# EAGLE board RedBoard_Turbo-Panel (EAGLE 9.0.1), part 1 of 4
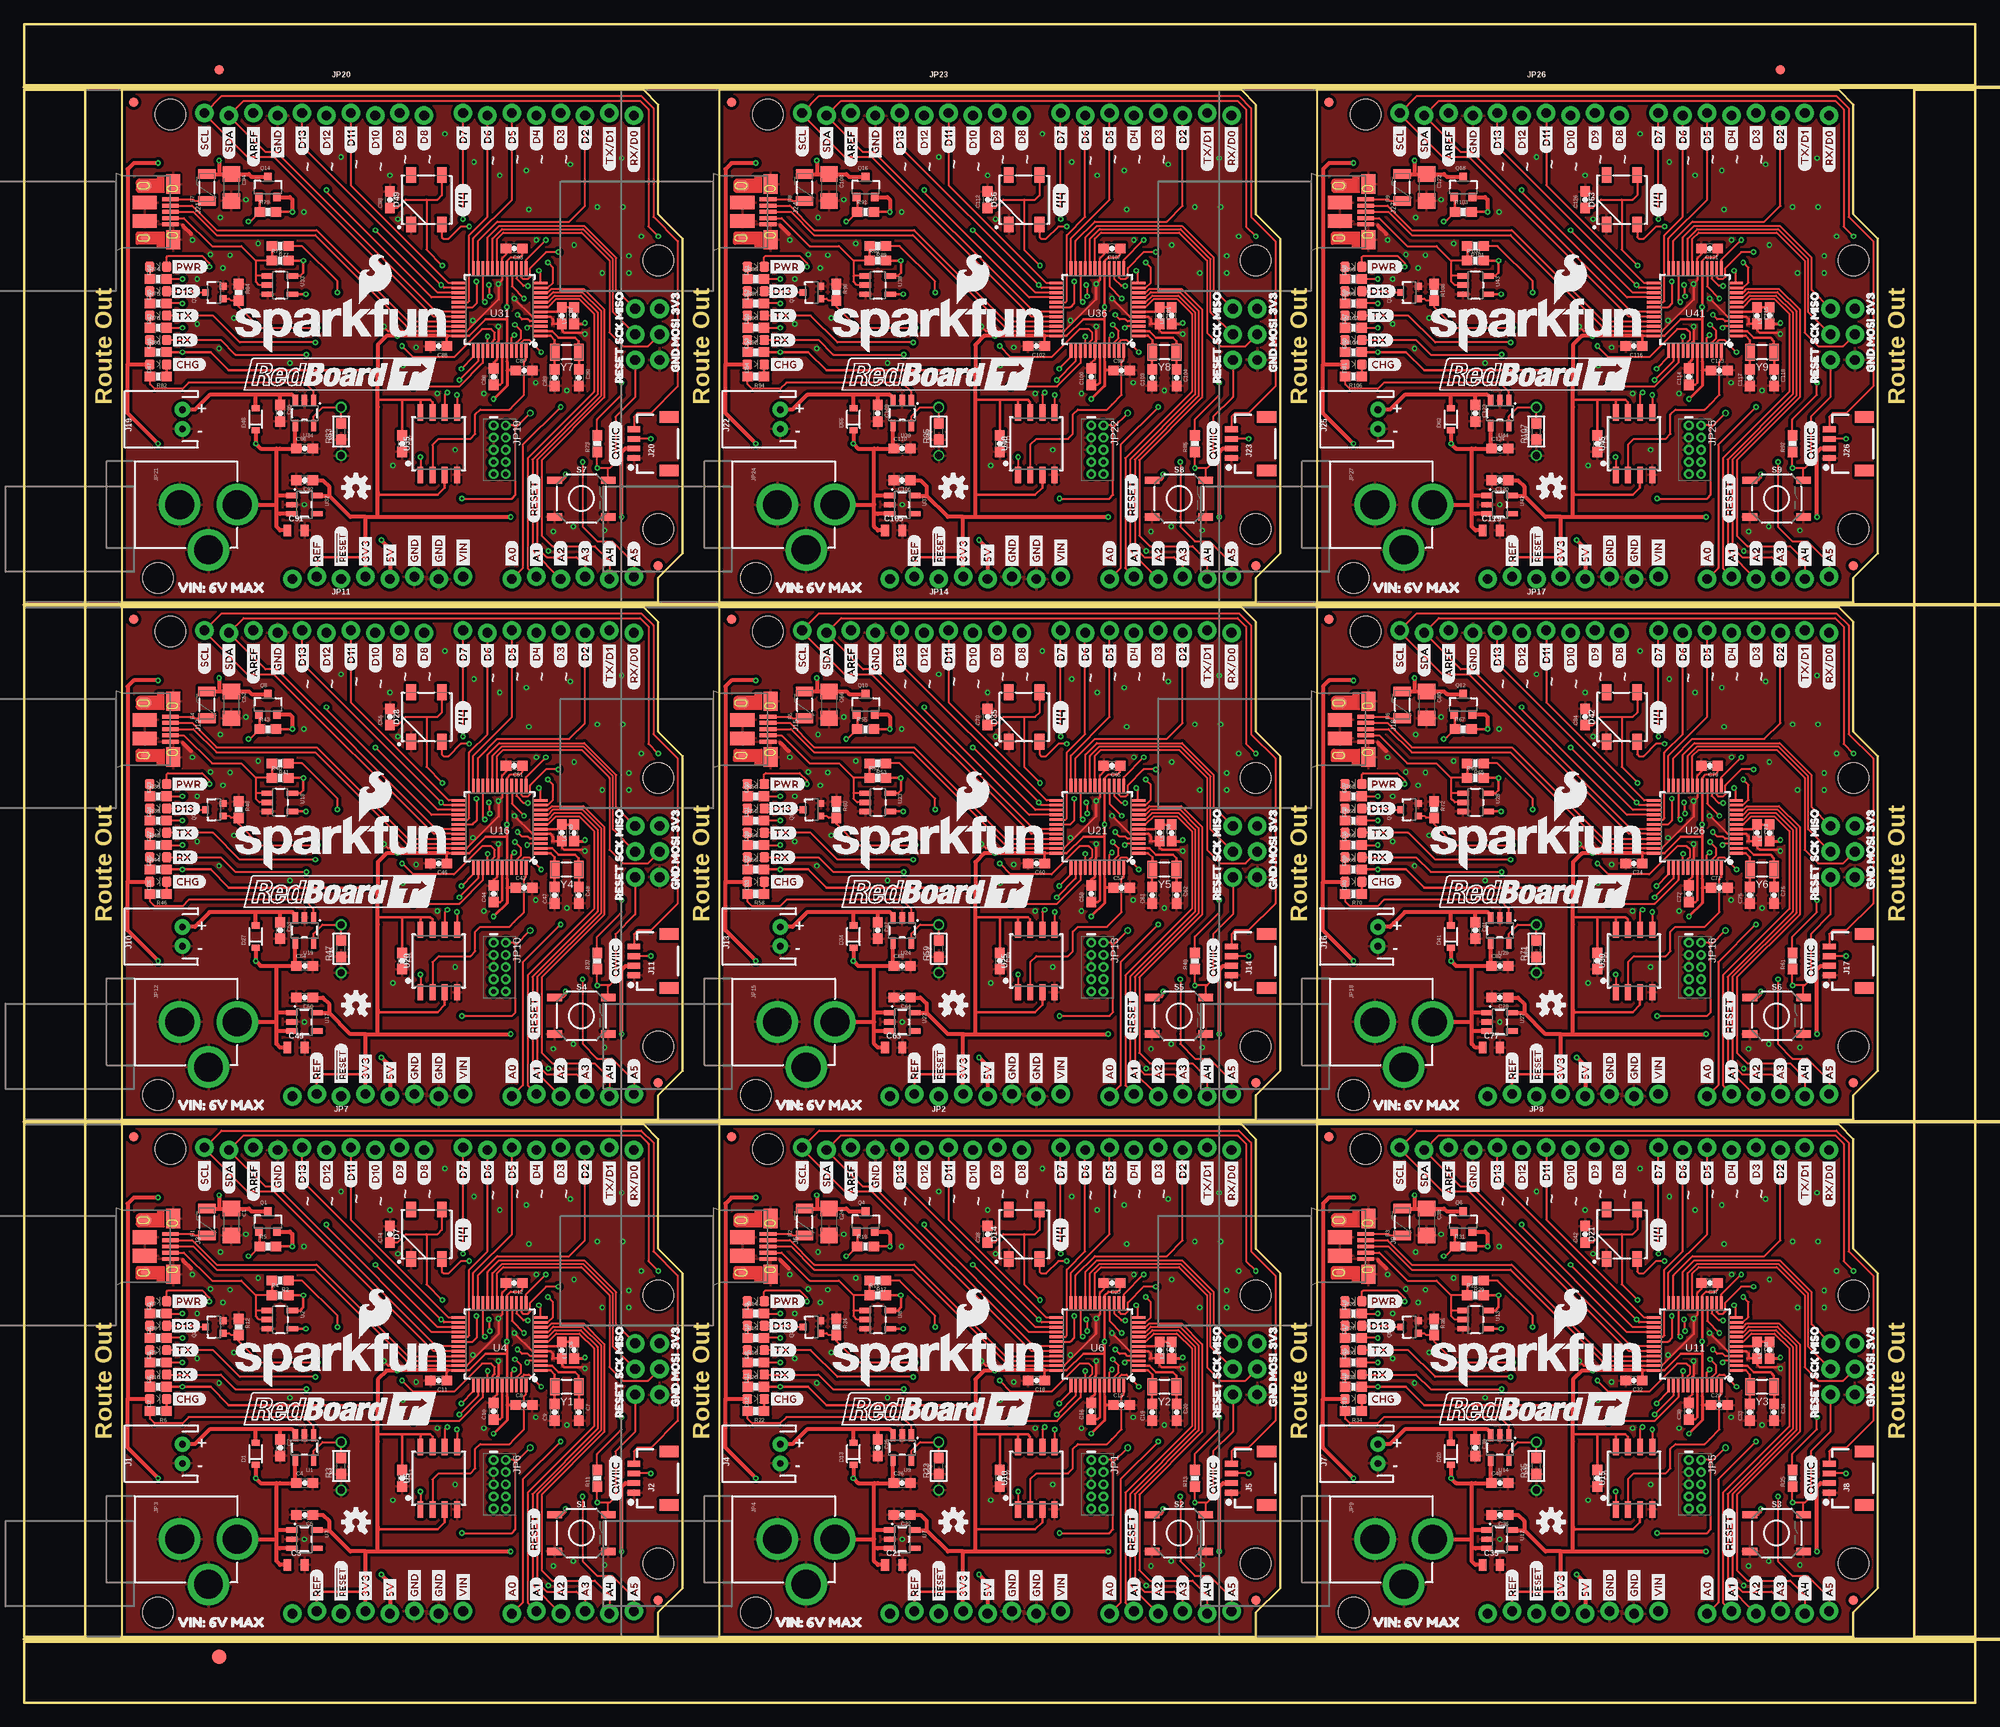
[diagram p0: board, top side]
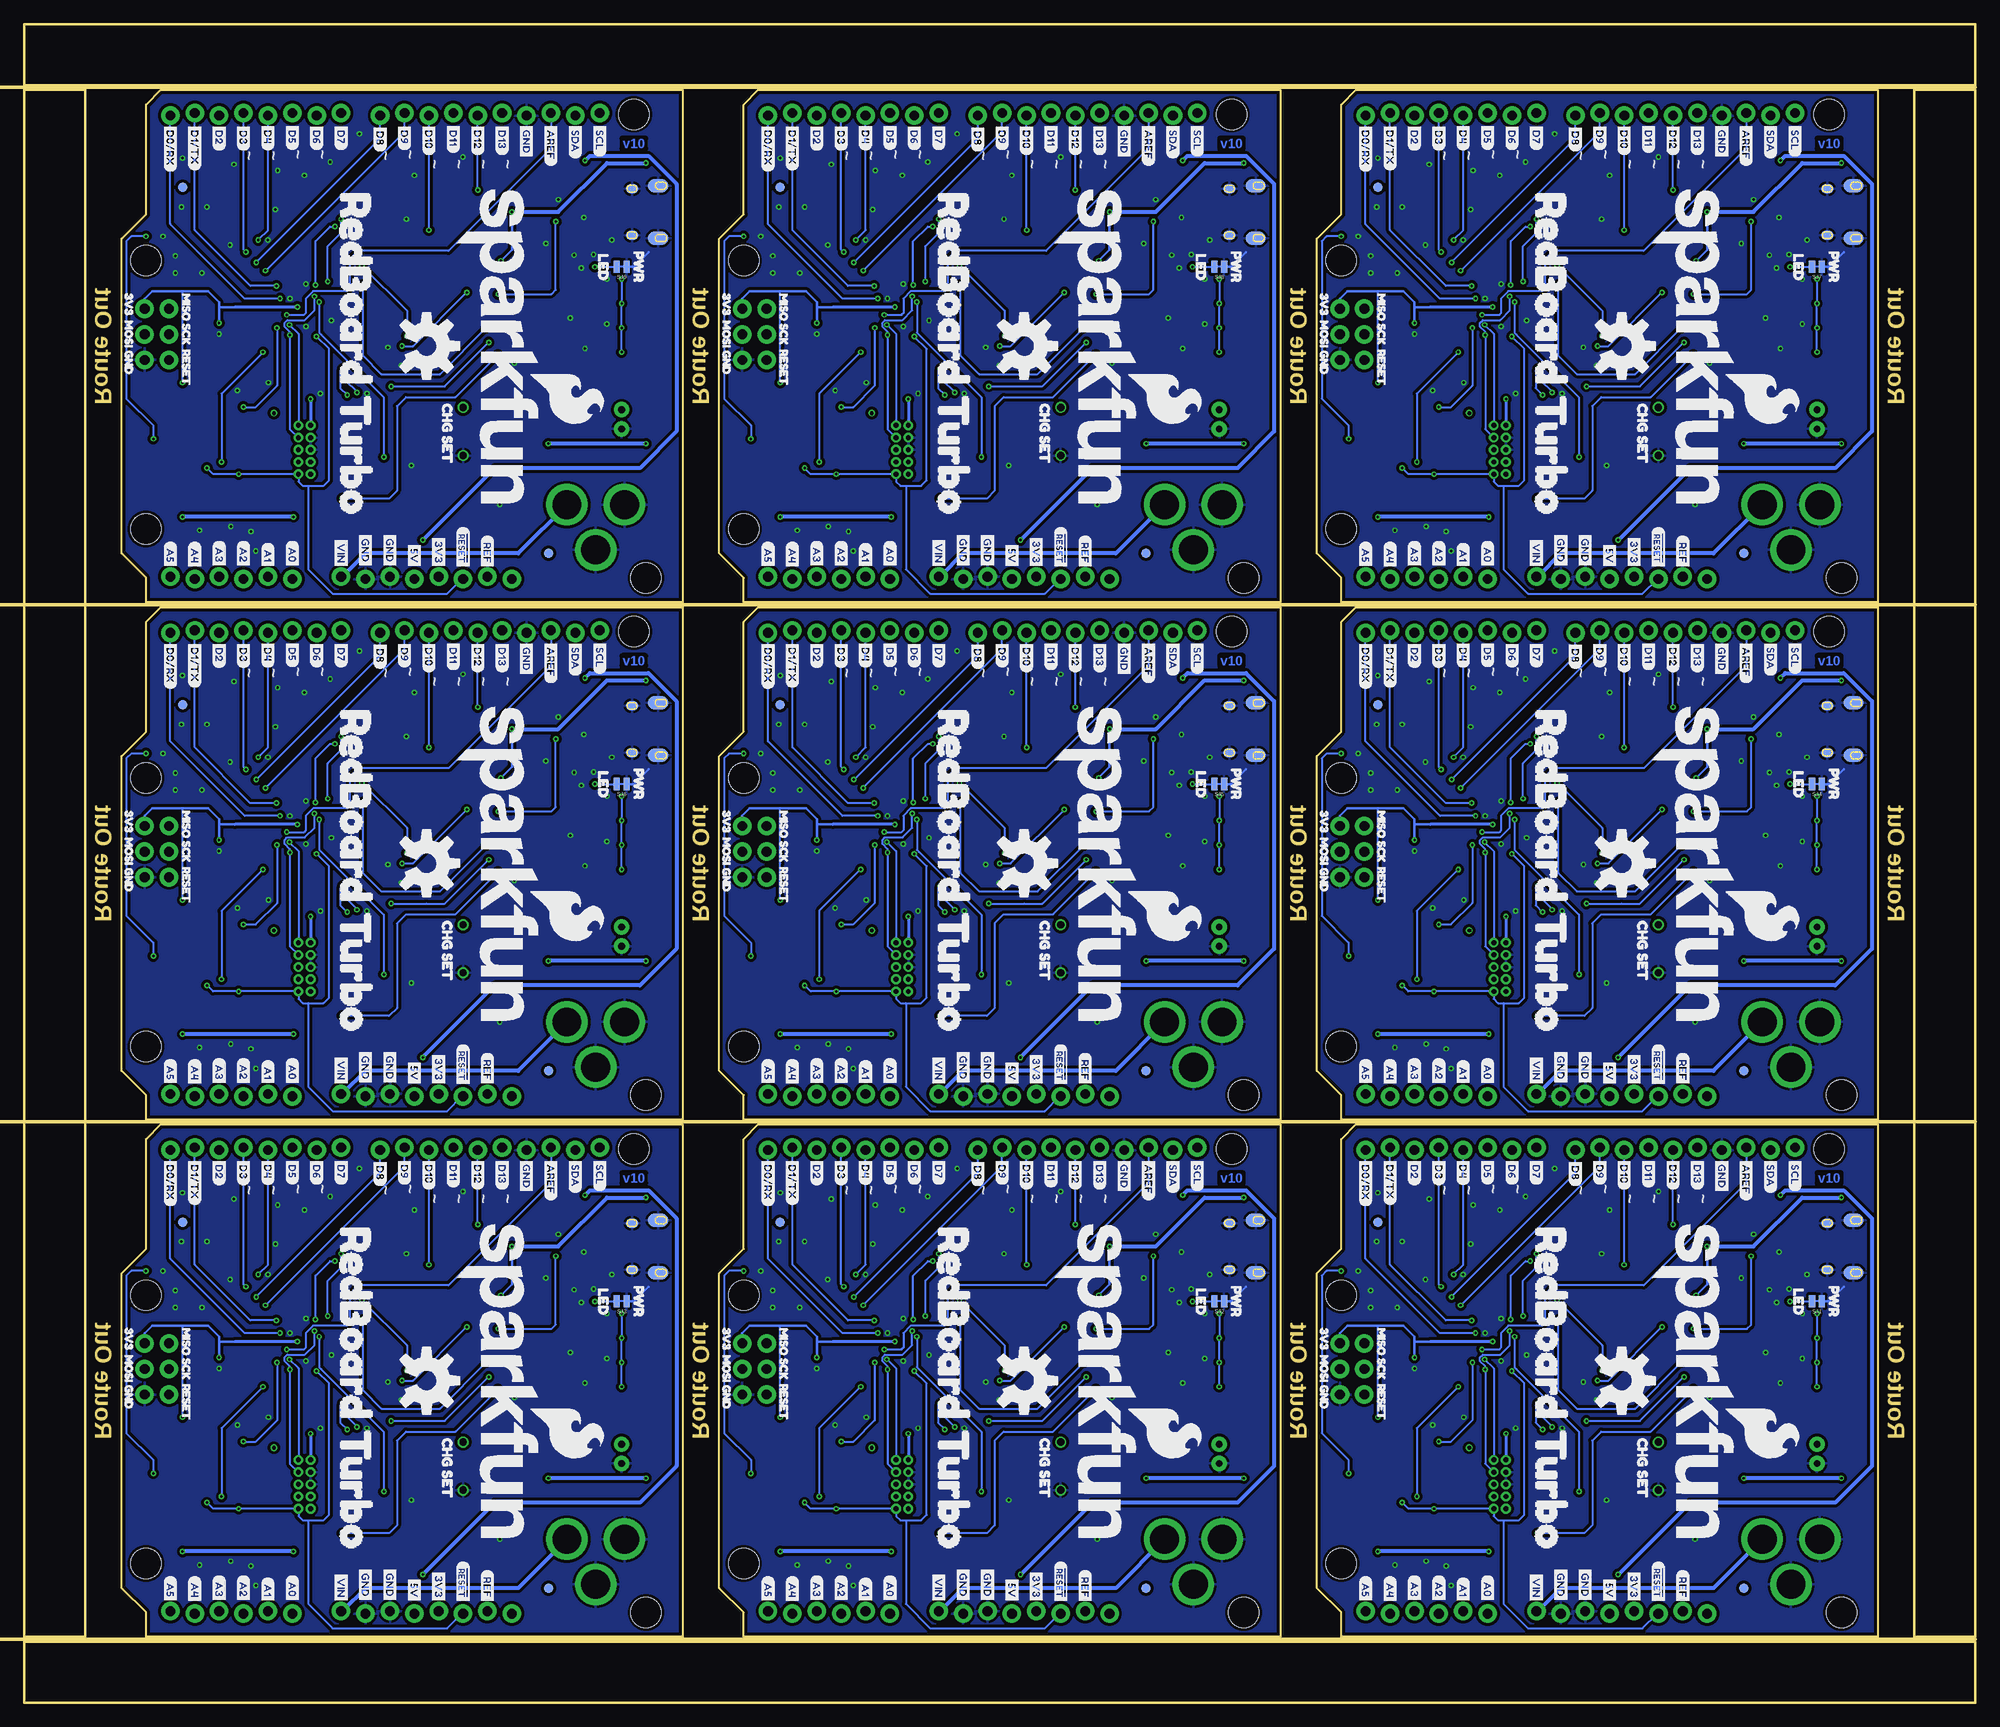
[diagram p1: board, bottom side, seen from below]

Size 203.2 x 174.75 mm. Coordinates in mm from the lower left corner, seen from the top.
Outline: 10.16,60.2 10.16,6.86 66.04,6.86 66.04,9.4 68.58,11.94 68.58,44.7 66.04,47.24 66.04,58.67 64.52,60.2 10.16,60.2
Outline: 72.39,60.2 72.39,6.86 128.27,6.86 128.27,9.4 130.81,11.94 130.81,44.7 128.27,47.24 128.27,58.67 126.75,60.2 72.39,60.2
Outline: 134.62,60.2 134.62,6.86 190.5,6.86 190.5,9.4 193.04,11.94 193.04,44.7 190.5,47.24 190.5,58.67 188.98,60.2 134.62,60.2
Outline: 10.16,114.05 10.16,60.71 66.04,60.71 66.04,63.25 68.58,65.79 68.58,98.55 66.04,101.09 66.04,112.52 64.52,114.05 10.16,114.05
Outline: 72.39,114.05 72.39,60.71 128.27,60.71 128.27,63.25 130.81,65.79 130.81,98.55 128.27,101.09 128.27,112.52 126.75,114.05 72.39,114.05
Outline: 134.62,114.05 134.62,60.71 190.5,60.71 190.5,63.25 193.04,65.79 193.04,98.55 190.5,101.09 190.5,112.52 188.98,114.05 134.62,114.05
Outline: 10.16,167.89 10.16,114.55 66.04,114.55 66.04,117.09 68.58,119.63 68.58,152.4 66.04,154.94 66.04,166.37 64.52,167.89 10.16,167.89
Outline: 72.39,167.89 72.39,114.55 128.27,114.55 128.27,117.09 130.81,119.63 130.81,152.4 128.27,154.94 128.27,166.37 126.75,167.89 72.39,167.89
Outline: 134.62,167.89 134.62,114.55 190.5,114.55 190.5,117.09 193.04,119.63 193.04,152.4 190.5,154.94 190.5,166.37 188.98,167.89 134.62,167.89
Outline: 0,6.35 203.2,6.35 203.2,0 0,0 0,6.35
Outline: 196.85,167.89 203.2,167.89 203.2,6.86 196.85,6.86 196.85,167.89
Outline: 0,174.75 203.2,174.75 203.2,168.4 0,168.4 0,174.75
Outline: 0,167.89 6.35,167.89 6.35,6.86 0,6.86 0,167.89
Copper layers (1*16): Top 0.035mm / dielectric 1.5mm / Bottom 0.035mm
Design rules "SparkFun-2-layer-PCBWay-LIMIT": minimum track width 6mil, minimum drill 0.3mm, track to track 6mil, track to pad 6mil, pad to pad 6mil, via to via 6mil, smd to smd 6mil, copper to edge 6mil, drill to drill 6mil, minimum pad ring 6mil, minimum via ring 6mil, stop-mask expansion 4mil, vias tented up to drill 25mil, thermal gap 10mil
Milling: 4 lines

## Footprints (pad centres in the part's own frame; a part is rotated, then mirrored left to right if it is on the bottom)
1206@1 = smd 1.6 x 1.8: 1 -1.4,0; 2 1.4,0
0603-CAP = smd 1.1 x 1: 1 -0.85,0; 2 0.85,0
0805 = smd 0.8 x 1.2: 1 -0.9,0; 2 0.9,0
SOD-323 = smd 0.63 x 0.83: A 1.15,0; C -1.15,0
LED-0603 = smd 1 x 1: A -0.877,0; C 0.877,0
WS2812B = smd 1.651 x 1: 1 2.577,-1.6; 2 2.577,1.6; 3 -2.577,1.6; 4 -2.577,-1.6
FIDUCIAL-1X2 = smd 1 x 1: 1 0,0
FIDUCIAL-1.5X3 = smd 1.5 x 1.5: 1 0,0
PTC-1206 = smd 1 x 1.8: 1 -1.4,0; 2 1.4,0
JST-2-PTH = drill 0.7 pad 1.6: 1 -1,0; 2 1,0
1X04_1MM_RA = smd 0.6 x 1.35: 1 -1.5,0; 2 -0.5,0; 3 0.5,0; 4 1.5,0 | smd 1.2 x 2: NC1 2.8,-3.675; NC2 -2.8,-3.675
USB-MICROB-PTH-MILL = smd 0.4 x 1.75: D+ 0,0; D- -0.65,0; GND 1.3,0; ID 0.65,0; VBUS -1.3,0 | smd 2 x 1.46: SHIELD -2.9,0.275; SHIELD2 2.9,0.275 | smd 1.425 x 2.5: SHIELD3 -0.963,-2.675; SHIELD4 0.963,-2.675 | smd 1.4 x 2.1 bottom: SHIELD5 -2.731,-2.531; SHIELD7 2.729,-2.531 | smd 1 x 1: SHIELD6 2.7,-2.575 | smd 1.1 x 1.5: SHIELD8 -2.731,-2.731 | smd 1 x 1.3 bottom: SHIELD9 -2.43,0.195; SHIELD10 2.43,0.195
2X5-PTH-1.27MM = drill 0.508 pad 1: 1 -2.54,-0.635; 2 -2.54,0.635; 3 -1.27,-0.635; 4 -1.27,0.635; 5 0,-0.635; 6 0,0.635; 7 1.27,-0.635; 8 1.27,0.635; 9 2.54,-0.635; 10 2.54,0.635
ARDUINO_R3_LOCK_HOLES = drill 1.016 pad 1.93: 3.3V 35.56,2.667; 5V 38.1,2.413; A0 50.8,2.413; A1 53.34,2.667; A2 55.88,2.413; A3 58.42,2.667; A4 60.96,2.413; A5 63.5,2.667; AREF 23.876,50.927; D0 63.5,50.673; D1 60.96,50.927; D2 58.42,50.673; D3 55.88,50.927; D4 53.34,50.673; D5 50.8,50.927; D6 48.26,50.673; D7 45.72,50.927; D8 41.656,50.673; D9 39.116,50.927; D10 36.576,50.673; D11 34.036,50.927; D12 31.496,50.673; D13 28.956,50.927; GND@1 40.64,2.667; GND@2 43.18,2.413; GND@3 26.416,50.673; GND@4 66.18,25.223; IOREF 30.48,2.667; MISO 63.64,30.557; MOSI 66.18,27.89; NC 27.94,2.413; RESET@1 33.02,2.413; RESET@2 63.64,25.223; SCK 63.64,27.89; SCL 18.796,50.927; SDA 21.336,50.673; VCC 66.18,30.557; VIN 45.72,2.667 | hole 3.175: 15.24,50.8; 66.04,35.56; 66.04,7.62; 13.97,2.54
POWER_JACK_PTH = drill 2.997 pad 4.318: GND 0,7.7; GNDBREAK 4.7,10.7; PWR 0,13.7
0603 = smd 1.1 x 1: 1 -0.85,0; 2 0.85,0
SOT23-3 = smd 0.8 x 0.9: 1 -0.95,-1; 2 0.95,-1; 3 0,1.1
SOT323 = smd 0.7 x 0.7: 1 -0.65,-0.925; 2 0.65,-0.925; 3 0,0.925
0603-RES = smd 1.1 x 1: 1 -0.85,0; 2 0.85,0
1/6W-RES = drill 0.762: 1 -2.5,0; 2 2.5,0
TACTILE_SWITCH_SMD_5.2MM = smd 1.524 x 0.762: 1 -2.794,1.905; 2 2.794,1.905; 3 -2.794,-1.905; 4 2.794,-1.905
PAD-JUMPER-2-NC_BY_TRACE_NO_SILK = smd 0.635 x 1.27: 1 -0.508,0; 2 0.508,0
TP_15TH = drill 0.381 pad 0.61: P$1 0,0
SOT23-5 = smd 0.55 x 1.2: 1 -0.95,-1.3; 2 0,-1.3; 3 0.95,-1.3; 4 0.95,1.3; 5 -0.95,1.3
TQFP-48 = smd 1.5 x 0.28: 1 -4.25,2.75; 2 -4.25,2.25; 3 -4.25,1.75; 4 -4.25,1.25; 5 -4.25,0.75; 6 -4.25,0.25; 7 -4.25,-0.25; 8 -4.25,-0.75; 9 -4.25,-1.25; 10 -4.25,-1.75; 11 -4.25,-2.25; 12 -4.25,-2.75; 25 4.25,-2.75; 26 4.25,-2.25; 27 4.25,-1.75; 28 4.25,-1.25; 29 4.25,-0.75; 30 4.25,-0.25; 31 4.25,0.25; 32 4.25,0.75; 33 4.25,1.25; 34 4.25,1.75; 35 4.25,2.25; 36 4.25,2.75 | smd 0.28 x 1.5: 13 -2.75,-4.25; 14 -2.25,-4.25; 15 -1.75,-4.25; 16 -1.25,-4.25; 17 -0.75,-4.25; 18 -0.25,-4.25; 19 0.25,-4.25; 20 0.75,-4.25; 21 1.25,-4.25; 22 1.75,-4.25; 23 2.25,-4.25; 24 2.75,-4.25; 37 2.75,4.25; 38 2.25,4.25; 39 1.75,4.25; 40 1.25,4.25; 41 0.75,4.25; 42 0.25,4.25; 43 -0.25,4.25; 44 -0.75,4.25; 45 -1.25,4.25; 46 -1.75,4.25; 47 -2.25,4.25; 48 -2.75,4.25
SOIC-8 = smd 0.61 x 1.702: 1 -1.905,-3.251; 2 -0.635,-3.251; 3 0.635,-3.251; 4 1.905,-3.251; 5 1.905,3.251; 6 0.635,3.251; 7 -0.635,3.251; 8 -1.905,3.251
CRYSTAL-SMD-3.2X1.5MM = smd 1 x 1.8: P$1 -1.25,0; P$2 1.25,0

## Placement (x,y rotation side)
C1  2.2UF  [1206@1]  21.59,50.04 270 top
C2  4.7uF  [0603-CAP]  26.67,26.54 270 top
C3  1.0uF  [0805]  28.32,14.35 0 top
C4  4.7uF  [0603-CAP]  29.21,22.86 0 top
C5  2.2uF  [0603-CAP]  29.21,19.56 180 top
C6  0.1uF  [0603-CAP]  56.01,36.7 270 top
C7  15pF  [0603-CAP]  57.78,30.23 270 top
C8  0.1uF  [0603-CAP]  52.07,30.99 0 top
C9  15pF  [0603-CAP]  55.25,30.23 90 top
C10  0.1uF  [0603-CAP]  48.89,30.35 90 top
C11  0.1uF  [0603-CAP]  43.18,33.53 180 top
C12  0.1uF  [0603-CAP]  51.05,43.69 180 top
C13  0.1uF  [0603-CAP]  39.37,23.37 270 top
C14  0.1uF  [0603-CAP]  38.1,48.77 90 top
C15  0.1uF  [0603-CAP]  114.3,30.99 0 top
C16  0.1uF  [0603-CAP]  111.12,30.35 90 top
C17  0.1uF  [0603-CAP]  118.24,36.7 270 top
C18  0.1uF  [0603-CAP]  105.41,33.53 180 top
C19  15pF  [0603-CAP]  117.47,30.23 90 top
C20  15pF  [0603-CAP]  120.02,30.23 270 top
C21  1.0uF  [0805]  90.55,14.35 0 top
C22  2.2uF  [0603-CAP]  91.44,19.56 180 top
C23  0.1uF  [0603-CAP]  113.28,43.69 180 top
C24  2.2UF  [1206@1]  83.82,50.04 270 top
C25  4.7uF  [0603-CAP]  88.9,26.54 270 top
C26  4.7uF  [0603-CAP]  91.44,22.86 0 top
C27  0.1uF  [0603-CAP]  101.6,23.37 270 top
C28  0.1uF  [0603-CAP]  100.33,48.77 90 top
C29  0.1uF  [0603-CAP]  176.53,30.99 0 top
C30  0.1uF  [0603-CAP]  173.35,30.35 90 top
C31  0.1uF  [0603-CAP]  180.47,36.7 270 top
C32  0.1uF  [0603-CAP]  167.64,33.53 180 top
C33  15pF  [0603-CAP]  179.7,30.23 90 top
C34  15pF  [0603-CAP]  182.25,30.23 270 top
C35  1.0uF  [0805]  152.78,14.35 0 top
C36  2.2uF  [0603-CAP]  153.67,19.56 180 top
C37  0.1uF  [0603-CAP]  175.51,43.69 180 top
C38  2.2UF  [1206@1]  146.05,50.04 270 top
C39  4.7uF  [0603-CAP]  151.13,26.54 270 top
C40  4.7uF  [0603-CAP]  153.67,22.86 0 top
C41  0.1uF  [0603-CAP]  163.83,23.37 270 top
C42  0.1uF  [0603-CAP]  162.56,48.77 90 top
C43  0.1uF  [0603-CAP]  52.07,84.84 0 top
C44  0.1uF  [0603-CAP]  48.89,84.2 90 top
C45  0.1uF  [0603-CAP]  56.01,90.55 270 top
C46  0.1uF  [0603-CAP]  43.18,87.38 180 top
C47  15pF  [0603-CAP]  55.25,84.07 90 top
C48  15pF  [0603-CAP]  57.78,84.07 270 top
C49  1.0uF  [0805]  28.32,68.2 0 top
C50  2.2uF  [0603-CAP]  29.21,73.41 180 top
C51  0.1uF  [0603-CAP]  51.05,97.54 180 top
C52  2.2UF  [1206@1]  21.59,103.89 270 top
C53  4.7uF  [0603-CAP]  26.67,80.39 270 top
C54  4.7uF  [0603-CAP]  29.21,76.71 0 top
C55  0.1uF  [0603-CAP]  39.37,77.22 270 top
C56  0.1uF  [0603-CAP]  38.1,102.62 90 top
C57  0.1uF  [0603-CAP]  114.3,84.84 0 top
C58  0.1uF  [0603-CAP]  111.12,84.2 90 top
C59  0.1uF  [0603-CAP]  118.24,90.55 270 top
C60  0.1uF  [0603-CAP]  105.41,87.38 180 top
C61  15pF  [0603-CAP]  117.47,84.07 90 top
C62  15pF  [0603-CAP]  120.02,84.07 270 top
C63  1.0uF  [0805]  90.55,68.2 0 top
C64  2.2uF  [0603-CAP]  91.44,73.41 180 top
C65  0.1uF  [0603-CAP]  113.28,97.54 180 top
C66  2.2UF  [1206@1]  83.82,103.89 270 top
C67  4.7uF  [0603-CAP]  88.9,80.39 270 top
C68  4.7uF  [0603-CAP]  91.44,76.71 0 top
C69  0.1uF  [0603-CAP]  101.6,77.22 270 top
C70  0.1uF  [0603-CAP]  100.33,102.62 90 top
C71  0.1uF  [0603-CAP]  176.53,84.84 0 top
C72  0.1uF  [0603-CAP]  173.35,84.2 90 top
C73  0.1uF  [0603-CAP]  180.47,90.55 270 top
C74  0.1uF  [0603-CAP]  167.64,87.38 180 top
C75  15pF  [0603-CAP]  179.7,84.07 90 top
C76  15pF  [0603-CAP]  182.25,84.07 270 top
C77  1.0uF  [0805]  152.78,68.2 0 top
C78  2.2uF  [0603-CAP]  153.67,73.41 180 top
C79  0.1uF  [0603-CAP]  175.51,97.54 180 top
C80  2.2UF  [1206@1]  146.05,103.89 270 top
C81  4.7uF  [0603-CAP]  151.13,80.39 270 top
C82  4.7uF  [0603-CAP]  153.67,76.71 0 top
C83  0.1uF  [0603-CAP]  163.83,77.22 270 top
C84  0.1uF  [0603-CAP]  162.56,102.62 90 top
C85  0.1uF  [0603-CAP]  52.07,138.68 0 top
C86  0.1uF  [0603-CAP]  48.89,138.05 90 top
C87  0.1uF  [0603-CAP]  56.01,144.4 270 top
C88  0.1uF  [0603-CAP]  43.18,141.22 180 top
C89  15pF  [0603-CAP]  55.25,137.92 90 top
C90  15pF  [0603-CAP]  57.78,137.92 270 top
C91  1.0uF  [0805]  28.32,122.05 0 top
C92  2.2uF  [0603-CAP]  29.21,127.25 180 top
C93  0.1uF  [0603-CAP]  51.05,151.38 180 top
C94  2.2UF  [1206@1]  21.59,157.73 270 top
C95  4.7uF  [0603-CAP]  26.67,134.24 270 top
C96  4.7uF  [0603-CAP]  29.21,130.56 0 top
C97  0.1uF  [0603-CAP]  39.37,131.06 270 top
C98  0.1uF  [0603-CAP]  38.1,156.46 90 top
C99  0.1uF  [0603-CAP]  114.3,138.68 0 top
C100  0.1uF  [0603-CAP]  111.12,138.05 90 top
C101  0.1uF  [0603-CAP]  118.24,144.4 270 top
C102  0.1uF  [0603-CAP]  105.41,141.22 180 top
C103  15pF  [0603-CAP]  117.47,137.92 90 top
C104  15pF  [0603-CAP]  120.02,137.92 270 top
C105  1.0uF  [0805]  90.55,122.05 0 top
C106  2.2uF  [0603-CAP]  91.44,127.25 180 top
C107  0.1uF  [0603-CAP]  113.28,151.38 180 top
C108  2.2UF  [1206@1]  83.82,157.73 270 top
C109  4.7uF  [0603-CAP]  88.9,134.24 270 top
C110  4.7uF  [0603-CAP]  91.44,130.56 0 top
C111  0.1uF  [0603-CAP]  101.6,131.06 270 top
C112  0.1uF  [0603-CAP]  100.33,156.46 90 top
C113  0.1uF  [0603-CAP]  176.53,138.68 0 top
C114  0.1uF  [0603-CAP]  173.35,138.05 90 top
C115  0.1uF  [0603-CAP]  180.47,144.4 270 top
C116  0.1uF  [0603-CAP]  167.64,141.22 180 top
C117  15pF  [0603-CAP]  179.7,137.92 90 top
C118  15pF  [0603-CAP]  182.25,137.92 270 top
C119  1.0uF  [0805]  152.78,122.05 0 top
C120  2.2uF  [0603-CAP]  153.67,127.25 180 top
C121  0.1uF  [0603-CAP]  175.51,151.38 180 top
C122  2.2UF  [1206@1]  146.05,157.73 270 top
C123  4.7uF  [0603-CAP]  151.13,134.24 270 top
C124  4.7uF  [0603-CAP]  153.67,130.56 0 top
C125  0.1uF  [0603-CAP]  163.83,131.06 270 top
C126  0.1uF  [0603-CAP]  162.56,156.46 90 top
D1  BAT20J  [SOD-323]  24.13,25.91 90 top
D2  Yellow  [LED-0603]  13.97,31.62 0 top
D3  RED  [LED-0603]  13.97,41.78 0 top
D4  BLUE  [LED-0603]  13.97,39.24 0 top
D5  GREEN  [LED-0603]  13.97,36.7 0 top
D6  Yellow  [LED-0603]  13.97,34.16 0 top
D7  WS2812B  [WS2812B]  41.91,48.77 90 top
D8  GREEN  [LED-0603]  76.2,36.7 0 top
D9  RED  [LED-0603]  76.2,41.78 0 top
D10  BLUE  [LED-0603]  76.2,39.24 0 top
D11  Yellow  [LED-0603]  76.2,34.16 0 top
D12  Yellow  [LED-0603]  76.2,31.62 0 top
D13  BAT20J  [SOD-323]  86.36,25.91 90 top
D14  WS2812B  [WS2812B]  104.14,48.77 90 top
D15  GREEN  [LED-0603]  138.43,36.7 0 top
D16  RED  [LED-0603]  138.43,41.78 0 top
D17  BLUE  [LED-0603]  138.43,39.24 0 top
D18  Yellow  [LED-0603]  138.43,34.16 0 top
D19  Yellow  [LED-0603]  138.43,31.62 0 top
D20  BAT20J  [SOD-323]  148.59,25.91 90 top
D21  WS2812B  [WS2812B]  166.37,48.77 90 top
D22  GREEN  [LED-0603]  13.97,90.55 0 top
D23  RED  [LED-0603]  13.97,95.63 0 top
D24  BLUE  [LED-0603]  13.97,93.09 0 top
D25  Yellow  [LED-0603]  13.97,88.01 0 top
D26  Yellow  [LED-0603]  13.97,85.47 0 top
D27  BAT20J  [SOD-323]  24.13,79.76 90 top
D28  WS2812B  [WS2812B]  41.91,102.62 90 top
D29  GREEN  [LED-0603]  76.2,90.55 0 top
D30  RED  [LED-0603]  76.2,95.63 0 top
D31  BLUE  [LED-0603]  76.2,93.09 0 top
D32  Yellow  [LED-0603]  76.2,88.01 0 top
D33  Yellow  [LED-0603]  76.2,85.47 0 top
D34  BAT20J  [SOD-323]  86.36,79.76 90 top
D35  WS2812B  [WS2812B]  104.14,102.62 90 top
D36  GREEN  [LED-0603]  138.43,90.55 0 top
D37  RED  [LED-0603]  138.43,95.63 0 top
D38  BLUE  [LED-0603]  138.43,93.09 0 top
D39  Yellow  [LED-0603]  138.43,88.01 0 top
D40  Yellow  [LED-0603]  138.43,85.47 0 top
D41  BAT20J  [SOD-323]  148.59,79.76 90 top
D42  WS2812B  [WS2812B]  166.37,102.62 90 top
D43  GREEN  [LED-0603]  13.97,144.4 0 top
D44  RED  [LED-0603]  13.97,149.48 0 top
D45  BLUE  [LED-0603]  13.97,146.94 0 top
D46  Yellow  [LED-0603]  13.97,141.86 0 top
D47  Yellow  [LED-0603]  13.97,139.32 0 top
D48  BAT20J  [SOD-323]  24.13,133.6 90 top
D49  WS2812B  [WS2812B]  41.91,156.46 90 top
D50  GREEN  [LED-0603]  76.2,144.4 0 top
D51  RED  [LED-0603]  76.2,149.48 0 top
D52  BLUE  [LED-0603]  76.2,146.94 0 top
D53  Yellow  [LED-0603]  76.2,141.86 0 top
D54  Yellow  [LED-0603]  76.2,139.32 0 top
D55  BAT20J  [SOD-323]  86.36,133.6 90 top
D56  WS2812B  [WS2812B]  104.14,156.46 90 top
D57  GREEN  [LED-0603]  138.43,144.4 0 top
D58  RED  [LED-0603]  138.43,149.48 0 top
D59  BLUE  [LED-0603]  138.43,146.94 0 top
D60  Yellow  [LED-0603]  138.43,141.86 0 top
D61  Yellow  [LED-0603]  138.43,139.32 0 top
D62  BAT20J  [SOD-323]  148.59,133.6 90 top
D63  WS2812B  [WS2812B]  166.37,156.46 90 top
E$1  [FIDUCIAL-1X2]  20.32,169.99 0 top
E$2  [FIDUCIAL-1X2]  182.88,169.99 0 top
E$3  [FIDUCIAL-1.5X3]  20.32,4.76 0 top
F1  500mA  [PTC-1206]  19.05,50.04 90 top
F2  500mA  [PTC-1206]  81.28,50.04 90 top
F3  500mA  [PTC-1206]  143.51,50.04 90 top
F4  500mA  [PTC-1206]  19.05,103.89 90 top
F5  500mA  [PTC-1206]  81.28,103.89 90 top
F6  500mA  [PTC-1206]  143.51,103.89 90 top
F7  500mA  [PTC-1206]  19.05,157.73 90 top
F8  500mA  [PTC-1206]  81.28,157.73 90 top
F9  500mA  [PTC-1206]  143.51,157.73 90 top
FID1  FIDUCIAL1X2  [FIDUCIAL-1X2]  11.43,58.93 0 top
FID2  FIDUCIAL1X2  [FIDUCIAL-1X2]  66.04,10.67 0 top
FID3  FIDUCIAL1X2  [FIDUCIAL-1X2]  24.13,11.94 0 bottom
FID4  FIDUCIAL1X2  [FIDUCIAL-1X2]  62.23,50.04 0 bottom
FID5  FIDUCIAL1X2  [FIDUCIAL-1X2]  128.27,10.67 0 top
FID6  FIDUCIAL1X2  [FIDUCIAL-1X2]  73.66,58.93 0 top
FID7  FIDUCIAL1X2  [FIDUCIAL-1X2]  86.36,11.94 0 bottom
FID8  FIDUCIAL1X2  [FIDUCIAL-1X2]  124.46,50.04 0 bottom
FID9  FIDUCIAL1X2  [FIDUCIAL-1X2]  190.5,10.67 0 top
FID10  FIDUCIAL1X2  [FIDUCIAL-1X2]  135.89,58.93 0 top
FID11  FIDUCIAL1X2  [FIDUCIAL-1X2]  148.59,11.94 0 bottom
FID12  FIDUCIAL1X2  [FIDUCIAL-1X2]  186.69,50.04 0 bottom
FID13  FIDUCIAL1X2  [FIDUCIAL-1X2]  66.04,64.52 0 top
FID14  FIDUCIAL1X2  [FIDUCIAL-1X2]  11.43,112.78 0 top
FID15  FIDUCIAL1X2  [FIDUCIAL-1X2]  24.13,65.79 0 bottom
FID16  FIDUCIAL1X2  [FIDUCIAL-1X2]  62.23,103.89 0 bottom
FID17  FIDUCIAL1X2  [FIDUCIAL-1X2]  128.27,64.52 0 top
FID18  FIDUCIAL1X2  [FIDUCIAL-1X2]  73.66,112.78 0 top
FID19  FIDUCIAL1X2  [FIDUCIAL-1X2]  86.36,65.79 0 bottom
FID20  FIDUCIAL1X2  [FIDUCIAL-1X2]  124.46,103.89 0 bottom
FID21  FIDUCIAL1X2  [FIDUCIAL-1X2]  190.5,64.52 0 top
FID22  FIDUCIAL1X2  [FIDUCIAL-1X2]  135.89,112.78 0 top
FID23  FIDUCIAL1X2  [FIDUCIAL-1X2]  148.59,65.79 0 bottom
FID24  FIDUCIAL1X2  [FIDUCIAL-1X2]  186.69,103.89 0 bottom
FID25  FIDUCIAL1X2  [FIDUCIAL-1X2]  66.04,118.36 0 top
FID26  FIDUCIAL1X2  [FIDUCIAL-1X2]  11.43,166.62 0 top
FID27  FIDUCIAL1X2  [FIDUCIAL-1X2]  24.13,119.63 0 bottom
FID28  FIDUCIAL1X2  [FIDUCIAL-1X2]  62.23,157.73 0 bottom
FID29  FIDUCIAL1X2  [FIDUCIAL-1X2]  128.27,118.36 0 top
FID30  FIDUCIAL1X2  [FIDUCIAL-1X2]  73.66,166.62 0 top
FID31  FIDUCIAL1X2  [FIDUCIAL-1X2]  86.36,119.63 0 bottom
FID32  FIDUCIAL1X2  [FIDUCIAL-1X2]  124.46,157.73 0 bottom
FID33  FIDUCIAL1X2  [FIDUCIAL-1X2]  190.5,118.36 0 top
FID34  FIDUCIAL1X2  [FIDUCIAL-1X2]  135.89,166.62 0 top
FID35  FIDUCIAL1X2  [FIDUCIAL-1X2]  148.59,119.63 0 bottom
FID36  FIDUCIAL1X2  [FIDUCIAL-1X2]  186.69,157.73 0 bottom
J1  [JST-2-PTH]  16.51,25.91 90 top
J2  [1X04_1MM_RA]  63.5,23.37 90 top
J3  [USB-MICROB-PTH-MILL]  15.24,47.5 270 top
J4  [JST-2-PTH]  78.74,25.91 90 top
J5  [1X04_1MM_RA]  125.73,23.37 90 top
J6  [USB-MICROB-PTH-MILL]  77.47,47.5 270 top
J7  [JST-2-PTH]  140.97,25.91 90 top
J8  [1X04_1MM_RA]  187.96,23.37 90 top
J9  [USB-MICROB-PTH-MILL]  139.7,47.5 270 top
J10  [JST-2-PTH]  16.51,79.76 90 top
J11  [1X04_1MM_RA]  63.5,77.22 90 top
J12  [USB-MICROB-PTH-MILL]  15.24,101.35 270 top
J13  [JST-2-PTH]  78.74,79.76 90 top
J14  [1X04_1MM_RA]  125.73,77.22 90 top
J15  [USB-MICROB-PTH-MILL]  77.47,101.35 270 top
J16  [JST-2-PTH]  140.97,79.76 90 top
J17  [1X04_1MM_RA]  187.96,77.22 90 top
J18  [USB-MICROB-PTH-MILL]  139.7,101.35 270 top
J19  [JST-2-PTH]  16.51,133.6 90 top
J20  [1X04_1MM_RA]  63.5,131.06 90 top
J21  [USB-MICROB-PTH-MILL]  15.24,155.19 270 top
J22  [JST-2-PTH]  78.74,133.6 90 top
J23  [1X04_1MM_RA]  125.73,131.06 90 top
J24  [USB-MICROB-PTH-MILL]  77.47,155.19 270 top
J25  [JST-2-PTH]  140.97,133.6 90 top
J26  [1X04_1MM_RA]  187.96,131.06 90 top
J27  [USB-MICROB-PTH-MILL]  139.7,155.19 270 top
JP1  CORTEX_DEBUGPTH  [2X5-PTH-1.27MM]  111.76,22.73 270 top
JP2  ARDUINO_UNO_R3LOCK_HOLES  [ARDUINO_R3_LOCK_HOLES]  62.23,6.86 0 top
JP3  POWER_JACKPTH  [POWER_JACK_PTH]  8.51,17.02 270 top
JP4  POWER_JACKPTH  [POWER_JACK_PTH]  70.74,17.02 270 top
JP5  CORTEX_DEBUGPTH  [2X5-PTH-1.27MM]  173.99,22.73 270 top
JP6  CORTEX_DEBUGPTH  [2X5-PTH-1.27MM]  49.53,22.73 270 top
JP7  ARDUINO_UNO_R3LOCK_HOLES  [ARDUINO_R3_LOCK_HOLES]  0,6.86 0 top
JP8  ARDUINO_UNO_R3LOCK_HOLES  [ARDUINO_R3_LOCK_HOLES]  124.46,6.86 0 top
JP9  POWER_JACKPTH  [POWER_JACK_PTH]  132.97,17.02 270 top
JP10  CORTEX_DEBUGPTH  [2X5-PTH-1.27MM]  49.53,76.58 270 top
JP11  ARDUINO_UNO_R3LOCK_HOLES  [ARDUINO_R3_LOCK_HOLES]  0,60.71 0 top
JP12  POWER_JACKPTH  [POWER_JACK_PTH]  8.51,70.87 270 top
JP13  CORTEX_DEBUGPTH  [2X5-PTH-1.27MM]  111.76,76.58 270 top
JP14  ARDUINO_UNO_R3LOCK_HOLES  [ARDUINO_R3_LOCK_HOLES]  62.23,60.71 0 top
JP15  POWER_JACKPTH  [POWER_JACK_PTH]  70.74,70.87 270 top
JP16  CORTEX_DEBUGPTH  [2X5-PTH-1.27MM]  173.99,76.58 270 top
JP17  ARDUINO_UNO_R3LOCK_HOLES  [ARDUINO_R3_LOCK_HOLES]  124.46,60.71 0 top
JP18  POWER_JACKPTH  [POWER_JACK_PTH]  132.97,70.87 270 top
JP19  CORTEX_DEBUGPTH  [2X5-PTH-1.27MM]  49.53,130.43 270 top
JP20  ARDUINO_UNO_R3LOCK_HOLES  [ARDUINO_R3_LOCK_HOLES]  0,114.55 0 top
JP21  POWER_JACKPTH  [POWER_JACK_PTH]  8.51,124.71 270 top
JP22  CORTEX_DEBUGPTH  [2X5-PTH-1.27MM]  111.76,130.43 270 top
JP23  ARDUINO_UNO_R3LOCK_HOLES  [ARDUINO_R3_LOCK_HOLES]  62.23,114.55 0 top
JP24  POWER_JACKPTH  [POWER_JACK_PTH]  70.74,124.71 270 top
JP25  CORTEX_DEBUGPTH  [2X5-PTH-1.27MM]  173.99,130.43 270 top
JP26  ARDUINO_UNO_R3LOCK_HOLES  [ARDUINO_R3_LOCK_HOLES]  124.46,114.55 0 top
JP27  POWER_JACKPTH  [POWER_JACK_PTH]  132.97,124.71 270 top
L1  FB - 30Ohm  [0603]  57.28,36.7 90 top
L2  FB - 30Ohm  [0603]  119.51,36.7 90 top
L3  FB - 30Ohm  [0603]  181.74,36.7 90 top
L4  FB - 30Ohm  [0603]  57.28,90.55 90 top
L5  FB - 30Ohm  [0603]  119.51,90.55 90 top
L6  FB - 30Ohm  [0603]  181.74,90.55 90 top
L7  FB - 30Ohm  [0603]  57.28,144.4 90 top
L8  FB - 30Ohm  [0603]  119.51,144.4 90 top
L9  FB - 30Ohm  [0603]  181.74,144.4 90 top
LOGO1  SFE_LOGO_NAME_FLAME.2_INCH  [SFE_LOGO_NAME_FLAME_.2]  33.02,35.69 0 top
LOGO2  SFE_LOGO_NAME_FLAME.3_INCH  [SFE_LOGO_NAME_FLAME_.3]  29.46,33.53 270 bottom
LOGO3  OSHW-LOGOS  [OSHW-LOGO-S]  34.54,18.8 0 top
LOGO4  OSHW-LOGOL  [OSHW-LOGO-L]  36.83,33.53 270 bottom
LOGO5  OSHW-LOGOS  [OSHW-LOGO-S]  96.77,18.8 0 top
LOGO6  SFE_LOGO_NAME_FLAME.2_INCH  [SFE_LOGO_NAME_FLAME_.2]  95.25,35.69 0 top
LOGO7  SFE_LOGO_NAME_FLAME.3_INCH  [SFE_LOGO_NAME_FLAME_.3]  91.69,33.53 270 bottom
LOGO8  OSHW-LOGOL  [OSHW-LOGO-L]  99.06,33.53 270 bottom
LOGO9  OSHW-LOGOS  [OSHW-LOGO-S]  159,18.8 0 top
LOGO10  SFE_LOGO_NAME_FLAME.2_INCH  [SFE_LOGO_NAME_FLAME_.2]  157.48,35.69 0 top
LOGO11  SFE_LOGO_NAME_FLAME.3_INCH  [SFE_LOGO_NAME_FLAME_.3]  153.92,33.53 270 bottom
LOGO12  OSHW-LOGOL  [OSHW-LOGO-L]  161.29,33.53 270 bottom
LOGO13  OSHW-LOGOS  [OSHW-LOGO-S]  34.54,72.64 0 top
LOGO14  SFE_LOGO_NAME_FLAME.2_INCH  [SFE_LOGO_NAME_FLAME_.2]  33.02,89.54 0 top
LOGO15  SFE_LOGO_NAME_FLAME.3_INCH  [SFE_LOGO_NAME_FLAME_.3]  29.46,87.38 270 bottom
LOGO16  OSHW-LOGOL  [OSHW-LOGO-L]  36.83,87.38 270 bottom
LOGO17  OSHW-LOGOS  [OSHW-LOGO-S]  96.77,72.64 0 top
LOGO18  SFE_LOGO_NAME_FLAME.2_INCH  [SFE_LOGO_NAME_FLAME_.2]  95.25,89.54 0 top
LOGO19  SFE_LOGO_NAME_FLAME.3_INCH  [SFE_LOGO_NAME_FLAME_.3]  91.69,87.38 270 bottom
LOGO20  OSHW-LOGOL  [OSHW-LOGO-L]  99.06,87.38 270 bottom
LOGO21  OSHW-LOGOS  [OSHW-LOGO-S]  159,72.64 0 top
LOGO22  SFE_LOGO_NAME_FLAME.2_INCH  [SFE_LOGO_NAME_FLAME_.2]  157.48,89.54 0 top
LOGO23  SFE_LOGO_NAME_FLAME.3_INCH  [SFE_LOGO_NAME_FLAME_.3]  153.92,87.38 270 bottom
LOGO24  OSHW-LOGOL  [OSHW-LOGO-L]  161.29,87.38 270 bottom
LOGO25  OSHW-LOGOS  [OSHW-LOGO-S]  34.54,126.49 0 top
LOGO26  SFE_LOGO_NAME_FLAME.2_INCH  [SFE_LOGO_NAME_FLAME_.2]  33.02,143.38 0 top
LOGO27  SFE_LOGO_NAME_FLAME.3_INCH  [SFE_LOGO_NAME_FLAME_.3]  29.46,141.22 270 bottom
LOGO28  OSHW-LOGOL  [OSHW-LOGO-L]  36.83,141.22 270 bottom
LOGO29  OSHW-LOGOS  [OSHW-LOGO-S]  96.77,126.49 0 top
LOGO30  SFE_LOGO_NAME_FLAME.2_INCH  [SFE_LOGO_NAME_FLAME_.2]  95.25,143.38 0 top
LOGO31  SFE_LOGO_NAME_FLAME.3_INCH  [SFE_LOGO_NAME_FLAME_.3]  91.69,141.22 270 bottom
LOGO32  OSHW-LOGOL  [OSHW-LOGO-L]  99.06,141.22 270 bottom
LOGO33  OSHW-LOGOS  [OSHW-LOGO-S]  159,126.49 0 top
LOGO34  SFE_LOGO_NAME_FLAME.2_INCH  [SFE_LOGO_NAME_FLAME_.2]  157.48,143.38 0 top
LOGO35  SFE_LOGO_NAME_FLAME.3_INCH  [SFE_LOGO_NAME_FLAME_.3]  153.92,141.22 270 bottom
LOGO36  OSHW-LOGOL  [OSHW-LOGO-L]  161.29,141.22 270 bottom
Q1  2.5A/30V  [SOT23-3]  25.4,50.04 0 top
Q2  2N7002PW  [SOT323]  19.81,39.12 90 top
Q3  2N7002PW  [SOT323]  82.04,39.12 90 top
Q4  2.5A/30V  [SOT23-3]  87.63,50.04 0 top
Q5  2N7002PW  [SOT323]  144.27,39.12 90 top
Q6  2.5A/30V  [SOT23-3]  149.86,50.04 0 top
Q7  2N7002PW  [SOT323]  19.81,92.96 90 top
Q8  2.5A/30V  [SOT23-3]  25.4,103.89 0 top
Q9  2N7002PW  [SOT323]  82.04,92.96 90 top
Q10  2.5A/30V  [SOT23-3]  87.63,103.89 0 top
Q11  2N7002PW  [SOT323]  144.27,92.96 90 top
Q12  2.5A/30V  [SOT23-3]  149.86,103.89 0 top
Q13  2N7002PW  [SOT323]  19.81,146.81 90 top
Q14  2.5A/30V  [SOT23-3]  25.4,157.73 0 top
Q15  2N7002PW  [SOT323]  82.04,146.81 90 top
Q16  2.5A/30V  [SOT23-3]  87.63,157.73 0 top
Q17  2N7002PW  [SOT323]  144.27,146.81 90 top
Q18  2.5A/30V  [SOT23-3]  149.86,157.73 0 top
R1  3.9K  [0603]  33.02,24.64 90 top
R2  330  [0603-RES]  26.67,43.94 180 top
R3  PROG  [1/6W-RES]  33.02,24.64 90 top
R4  100k  [0603-RES]  26.67,42.42 0 top
R5  47K  [0603-RES]  25.4,47.5 0 top
R6  330  [0603-RES]  13.97,30.35 180 top
R7  330  [0603-RES]  13.97,40.51 0 top
R8  330  [0603-RES]  13.97,37.97 0 top
R9  330  [0603-RES]  13.97,35.43 0 top
R10  330  [0603-RES]  13.97,32.89 0 top
R11  10K  [0603-RES]  59.69,23.37 90 top
R12  100k  [0603-RES]  22.35,39.12 270 top
R13  10K  [0603-RES]  121.92,23.37 90 top
R14  330  [0603-RES]  76.2,40.51 0 top
R15  330  [0603-RES]  76.2,37.97 0 top
R16  100k  [0603-RES]  88.9,42.42 0 top
R17  330  [0603-RES]  88.9,43.94 180 top
R18  330  [0603-RES]  76.2,35.43 0 top
R19  47K  [0603-RES]  87.63,47.5 0 top
R20  330  [0603-RES]  76.2,32.89 0 top
R21  3.9K  [0603]  95.25,24.64 90 top
R22  330  [0603-RES]  76.2,30.35 180 top
R23  PROG  [1/6W-RES]  95.25,24.64 90 top
R24  100k  [0603-RES]  84.58,39.12 270 top
R25  10K  [0603-RES]  184.15,23.37 90 top
R26  330  [0603-RES]  138.43,40.51 0 top
R27  330  [0603-RES]  138.43,37.97 0 top
R28  100k  [0603-RES]  151.13,42.42 0 top
R29  330  [0603-RES]  151.13,43.94 180 top
R30  330  [0603-RES]  138.43,35.43 0 top
R31  47K  [0603-RES]  149.86,47.5 0 top
R32  330  [0603-RES]  138.43,32.89 0 top
R33  3.9K  [0603]  157.48,24.64 90 top
R34  330  [0603-RES]  138.43,30.35 180 top
R35  PROG  [1/6W-RES]  157.48,24.64 90 top
R36  100k  [0603-RES]  146.81,39.12 270 top
R37  10K  [0603-RES]  59.69,77.22 90 top
R38  330  [0603-RES]  13.97,94.36 0 top
R39  330  [0603-RES]  13.97,91.82 0 top
R40  100k  [0603-RES]  26.67,96.27 0 top
R41  330  [0603-RES]  26.67,97.79 180 top
R42  330  [0603-RES]  13.97,89.28 0 top
R43  47K  [0603-RES]  25.4,101.35 0 top
R44  330  [0603-RES]  13.97,86.74 0 top
R45  3.9K  [0603]  33.02,78.49 90 top
R46  330  [0603-RES]  13.97,84.2 180 top
R47  PROG  [1/6W-RES]  33.02,78.49 90 top
R48  100k  [0603-RES]  22.35,92.96 270 top
R49  10K  [0603-RES]  121.92,77.22 90 top
R50  330  [0603-RES]  76.2,94.36 0 top
R51  330  [0603-RES]  76.2,91.82 0 top
R52  100k  [0603-RES]  88.9,96.27 0 top
R53  330  [0603-RES]  88.9,97.79 180 top
R54  330  [0603-RES]  76.2,89.28 0 top
R55  47K  [0603-RES]  87.63,101.35 0 top
R56  330  [0603-RES]  76.2,86.74 0 top
R57  3.9K  [0603]  95.25,78.49 90 top
R58  330  [0603-RES]  76.2,84.2 180 top
R59  PROG  [1/6W-RES]  95.25,78.49 90 top
R60  100k  [0603-RES]  84.58,92.96 270 top
R61  10K  [0603-RES]  184.15,77.22 90 top
R62  330  [0603-RES]  138.43,94.36 0 top
R63  330  [0603-RES]  138.43,91.82 0 top
R64  100k  [0603-RES]  151.13,96.27 0 top
R65  330  [0603-RES]  151.13,97.79 180 top
R66  330  [0603-RES]  138.43,89.28 0 top
R67  47K  [0603-RES]  149.86,101.35 0 top
R68  330  [0603-RES]  138.43,86.74 0 top
R69  3.9K  [0603]  157.48,78.49 90 top
R70  330  [0603-RES]  138.43,84.2 180 top
R71  PROG  [1/6W-RES]  157.48,78.49 90 top
R72  100k  [0603-RES]  146.81,92.96 270 top
R73  10K  [0603-RES]  59.69,131.06 90 top
R74  330  [0603-RES]  13.97,148.21 0 top
R75  330  [0603-RES]  13.97,145.67 0 top
R76  100k  [0603-RES]  26.67,150.11 0 top
R77  330  [0603-RES]  26.67,151.64 180 top
R78  330  [0603-RES]  13.97,143.13 0 top
R79  47K  [0603-RES]  25.4,155.19 0 top
R80  330  [0603-RES]  13.97,140.59 0 top
R81  3.9K  [0603]  33.02,132.33 90 top
R82  330  [0603-RES]  13.97,138.05 180 top
R83  PROG  [1/6W-RES]  33.02,132.33 90 top
R84  100k  [0603-RES]  22.35,146.81 270 top
R85  10K  [0603-RES]  121.92,131.06 90 top
R86  330  [0603-RES]  76.2,148.21 0 top
R87  330  [0603-RES]  76.2,145.67 0 top
R88  100k  [0603-RES]  88.9,150.11 0 top
R89  330  [0603-RES]  88.9,151.64 180 top
R90  330  [0603-RES]  76.2,143.13 0 top
R91  47K  [0603-RES]  87.63,155.19 0 top
R92  330  [0603-RES]  76.2,140.59 0 top
R93  3.9K  [0603]  95.25,132.33 90 top
R94  330  [0603-RES]  76.2,138.05 180 top
R95  PROG  [1/6W-RES]  95.25,132.33 90 top
R96  100k  [0603-RES]  84.58,146.81 270 top
R97  10K  [0603-RES]  184.15,131.06 90 top
R98  330  [0603-RES]  138.43,148.21 0 top
R99  330  [0603-RES]  138.43,145.67 0 top
R100  100k  [0603-RES]  151.13,150.11 0 top
R101  330  [0603-RES]  151.13,151.64 180 top
R102  330  [0603-RES]  138.43,143.13 0 top
R103  47K  [0603-RES]  149.86,155.19 0 top
R104  330  [0603-RES]  138.43,140.59 0 top
R105  3.9K  [0603]  157.48,132.33 90 top
R106  330  [0603-RES]  138.43,138.05 180 top
R107  PROG  [1/6W-RES]  157.48,132.33 90 top
R108  100k  [0603-RES]  146.81,146.81 270 top
S1  [TACTILE_SWITCH_SMD_5.2MM]  58.04,17.65 0 top
S2  [TACTILE_SWITCH_SMD_5.2MM]  120.27,17.65 0 top
S3  [TACTILE_SWITCH_SMD_5.2MM]  182.5,17.65 0 top
S4  [TACTILE_SWITCH_SMD_5.2MM]  58.04,71.5 0 top
S5  [TACTILE_SWITCH_SMD_5.2MM]  120.27,71.5 0 top
S6  [TACTILE_SWITCH_SMD_5.2MM]  182.5,71.5 0 top
S7  [TACTILE_SWITCH_SMD_5.2MM]  58.04,125.35 0 top
S8  [TACTILE_SWITCH_SMD_5.2MM]  120.27,125.35 0 top
S9  [TACTILE_SWITCH_SMD_5.2MM]  182.5,125.35 0 top
SJ1  PWR-LED  [PAD-JUMPER-2-NC_BY_TRACE_NO_SILK]  16.51,41.78 180 bottom
SJ2  PWR-LED  [PAD-JUMPER-2-NC_BY_TRACE_NO_SILK]  78.74,41.78 180 bottom
SJ3  PWR-LED  [PAD-JUMPER-2-NC_BY_TRACE_NO_SILK]  140.97,41.78 180 bottom
SJ4  PWR-LED  [PAD-JUMPER-2-NC_BY_TRACE_NO_SILK]  16.51,95.63 180 bottom
SJ5  PWR-LED  [PAD-JUMPER-2-NC_BY_TRACE_NO_SILK]  78.74,95.63 180 bottom
SJ6  PWR-LED  [PAD-JUMPER-2-NC_BY_TRACE_NO_SILK]  140.97,95.63 180 bottom
SJ7  PWR-LED  [PAD-JUMPER-2-NC_BY_TRACE_NO_SILK]  16.51,149.48 180 bottom
SJ8  PWR-LED  [PAD-JUMPER-2-NC_BY_TRACE_NO_SILK]  78.74,149.48 180 bottom
SJ9  PWR-LED  [PAD-JUMPER-2-NC_BY_TRACE_NO_SILK]  140.97,149.48 180 bottom
TP1  TEST-POINTTP_15TH_THRU  [TP_15TH]  52.7,26.54 0 top
TP2  TEST-POINTTP_15TH_THRU  [TP_15TH]  114.94,26.54 0 top
TP3  TEST-POINTTP_15TH_THRU  [TP_15TH]  177.16,26.54 0 top
TP4  TEST-POINTTP_15TH_THRU  [TP_15TH]  52.7,80.39 0 top
TP5  TEST-POINTTP_15TH_THRU  [TP_15TH]  114.94,80.39 0 top
TP6  TEST-POINTTP_15TH_THRU  [TP_15TH]  177.16,80.39 0 top
TP7  TEST-POINTTP_15TH_THRU  [TP_15TH]  52.7,134.24 0 top
TP8  TEST-POINTTP_15TH_THRU  [TP_15TH]  114.94,134.24 0 top
TP9  TEST-POINTTP_15TH_THRU  [TP_15TH]  177.16,134.24 0 top
U1  MCP73831  [SOT23-5]  29.21,26.54 180 top
U2  74AHC1G125  [SOT23-5]  26.67,39.88 270 top
U3  3.3V  [SOT23-5]  29.21,17.02 270 top
U4  ATSAMD21G-A  [TQFP-48]  49.53,37.34 180 top
U5  W25Q32FV  [SOIC-8]  43.18,23.37 0 top
U6  ATSAMD21G-A  [TQFP-48]  111.76,37.34 180 top
U7  3.3V  [SOT23-5]  91.44,17.02 270 top
U8  74AHC1G125  [SOT23-5]  88.9,39.88 270 top
U9  MCP73831  [SOT23-5]  91.44,26.54 180 top
U10  W25Q32FV  [SOIC-8]  105.41,23.37 0 top
U11  ATSAMD21G-A  [TQFP-48]  173.99,37.34 180 top
U12  3.3V  [SOT23-5]  153.67,17.02 270 top
U13  74AHC1G125  [SOT23-5]  151.13,39.88 270 top
U14  MCP73831  [SOT23-5]  153.67,26.54 180 top
U15  W25Q32FV  [SOIC-8]  167.64,23.37 0 top
U16  ATSAMD21G-A  [TQFP-48]  49.53,91.19 180 top
U17  3.3V  [SOT23-5]  29.21,70.87 270 top
U18  74AHC1G125  [SOT23-5]  26.67,93.73 270 top
U19  MCP73831  [SOT23-5]  29.21,80.39 180 top
U20  W25Q32FV  [SOIC-8]  43.18,77.22 0 top
U21  ATSAMD21G-A  [TQFP-48]  111.76,91.19 180 top
U22  3.3V  [SOT23-5]  91.44,70.87 270 top
U23  74AHC1G125  [SOT23-5]  88.9,93.73 270 top
U24  MCP73831  [SOT23-5]  91.44,80.39 180 top
U25  W25Q32FV  [SOIC-8]  105.41,77.22 0 top
U26  ATSAMD21G-A  [TQFP-48]  173.99,91.19 180 top
U27  3.3V  [SOT23-5]  153.67,70.87 270 top
U28  74AHC1G125  [SOT23-5]  151.13,93.73 270 top
U29  MCP73831  [SOT23-5]  153.67,80.39 180 top
U30  W25Q32FV  [SOIC-8]  167.64,77.22 0 top
U31  ATSAMD21G-A  [TQFP-48]  49.53,145.03 180 top
U32  3.3V  [SOT23-5]  29.21,124.71 270 top
U33  74AHC1G125  [SOT23-5]  26.67,147.57 270 top
U34  MCP73831  [SOT23-5]  29.21,134.24 180 top
U35  W25Q32FV  [SOIC-8]  43.18,131.06 0 top
U36  ATSAMD21G-A  [TQFP-48]  111.76,145.03 180 top
U37  3.3V  [SOT23-5]  91.44,124.71 270 top
U38  74AHC1G125  [SOT23-5]  88.9,147.57 270 top
U39  MCP73831  [SOT23-5]  91.44,134.24 180 top
U40  W25Q32FV  [SOIC-8]  105.41,131.06 0 top
U41  ATSAMD21G-A  [TQFP-48]  173.99,145.03 180 top
U42  3.3V  [SOT23-5]  153.67,124.71 270 top
U43  74AHC1G125  [SOT23-5]  151.13,147.57 270 top
U44  MCP73831  [SOT23-5]  153.67,134.24 180 top
U45  W25Q32FV  [SOIC-8]  167.64,131.06 0 top
U$1  [#RESET1]  33.02,10.16 90 top
U$2  [3V317]  35.56,10.29 90 top
U$3  [5V18]  38.1,10.29 90 top
U$4  [CHG30]  15.11,31.62 0 top
U$5  [RX#D015]  63.5,51.56 90 top
U$6  [TX#D114]  60.96,51.69 90 top
U$7  [D213]  58.42,53.85 90 top
U$8  [D312]  55.88,53.85 90 top
U$9  [D411]  53.34,53.85 90 top
U$10  [D510]  50.8,53.85 90 top
U$11  [D69]  48.26,53.85 90 top
U$12  [D78]  45.72,53.85 90 top
U$13  [D87]  41.66,53.85 90 top
U$14  [D96]  39.12,53.85 90 top
U$15  [D105]  36.58,53.34 90 top
U$16  [D114]  34.04,53.59 90 top
U$17  [D123]  31.5,53.34 90 top
U$18  [D132]  28.96,53.34 90 top
U$19  [GND16]  26.42,52.83 90 top
U$20  [SDA1]  21.34,52.96 90 top
U$21  [SCL0]  18.8,53.21 90 top
U$22  [TX28]  15.11,36.7 0 top
U$23  [RX29]  15.11,34.16 0 top
U$24  [PWR26]  15.11,41.78 0 top
U$25  [D1327]  14.99,39.24 0 top
U$26  [REF0]  30.48,10.29 90 top
U$27  [AREF2]  23.88,52.2 90 top
U$28  [QWIIC31]  61.59,20.95 90 top
U$29  [A020]  50.8,10.29 90 top
U$30  [A121]  53.34,10.29 90 top
U$31  [A222]  55.88,10.29 90 top
U$32  [A323]  58.42,10.29 90 top
U$33  [A424]  60.96,10.29 90 top
U$34  [A525]  63.5,10.29 90 top
U$35  [VIN19]  45.72,10.29 90 top
U$36  [GND16]  43.18,10.29 90 top
U$37  [GND16]  40.64,10.29 90 top
U$38  [GND7]  67.82,30.1 90 top
U$39  [MOSI4]  67.82,32.77 90 top
U$40  [3V36]  67.82,36.07 90 top
U$41  [SCK5]  61.98,33.02 90 top
U$42  [MISO3]  61.98,35.56 90 top
U$43  [RESET0]  61.98,28.96 90 top
U$44  [#RESET1]  33.02,14.86 270 bottom
U$45  [3V325]  35.56,13.97 270 bottom
U$46  [3V30]  67.82,39.75 270 bottom
U$47  [A018]  50.8,13.34 270 bottom
U$48  [A119]  53.34,13.08 270 bottom
U$49  [A220]  55.88,13.34 270 bottom
U$50  [A321]  58.42,13.34 270 bottom
U$51  [A422]  60.96,13.21 270 bottom
U$52  [A523]  63.5,13.21 270 bottom
U$53  [AREF2]  23.88,56.77 270 bottom
U$54  [LED1]  18.41,44.07 270 bottom
U$55  [D0#RX17]  63.5,56.77 270 bottom
U$56  [D1#TX15]  60.96,56.77 270 bottom
U$57  [5V26]  38.1,13.21 270 bottom
U$58  [D79]  45.72,56.77 270 bottom
U$59  [D88]  41.66,56.64 270 bottom
U$60  [D97]  39.12,56.77 270 bottom
U$61  [D106]  36.58,56.77 270 bottom
U$62  [D115]  34.04,56.77 270 bottom
U$63  [D124]  31.5,56.77 270 bottom
U$64  [D133]  28.96,56.77 270 bottom
U$65  [D214]  58.42,56.77 270 bottom
U$66  [D313]  55.88,56.77 270 bottom
U$67  [D412]  53.34,56.77 270 bottom
U$68  [D511]  50.8,56.77 270 bottom
U$69  [D610]  48.26,56.77 270 bottom
U$70  [GND24]  26.42,56.77 270 bottom
U$71  [GND24]  40.64,14.22 270 bottom
U$72  [GND24]  43.18,14.22 270 bottom
U$73  [GND33]  67.82,33.78 270 bottom
U$74  [PWR0]  14.73,44.32 270 bottom
U$75  [MISO30]  61.85,39.75 270 bottom
U$76  [MOSI34]  67.82,36.96 270 bottom
U$77  [REF28]  30.48,13.84 270 bottom
U$78  [RESET32]  61.85,33.91 270 bottom
U$79  [SCK31]  61.85,36.58 270 bottom
U$80  [SCL0]  18.8,56.77 270 bottom
U$81  [SDA1]  21.34,56.77 270 bottom
U$82  [VIN27]  45.72,13.72 270 bottom
U$83  [RESET0]  53.09,15.11 90 top
U$84  [440]  45.72,46.99 90 top
U$85  [REDBOARD_TURBO1]  44.2,52.32 270 bottom
U$86  [BITMAP#JPG]  32.89,30.61 0 top
U$87  [CHG_SET1]  34.67,28.45 270 bottom
U$88  [VIN#_6V_MAX2]  15.11,8.38 0 top
U$89  [3V317]  97.79,10.29 90 top
U$90  [5V18]  100.33,10.29 90 top
U$91  [CHG30]  77.34,31.62 0 top
U$92  [RX#D015]  125.73,51.56 90 top
U$93  [TX#D114]  123.19,51.69 90 top
U$94  [D213]  120.65,53.85 90 top
U$95  [D312]  118.11,53.85 90 top
U$96  [D411]  115.57,53.85 90 top
U$97  [D510]  113.03,53.85 90 top
U$98  [D69]  110.49,53.85 90 top
U$99  [D78]  107.95,53.85 90 top
U$100  [D87]  103.89,53.85 90 top
U$101  [D96]  101.35,53.85 90 top
U$102  [D105]  98.81,53.34 90 top
U$103  [D114]  96.27,53.59 90 top
U$104  [D123]  93.73,53.34 90 top
U$105  [D132]  91.19,53.34 90 top
U$106  [GND16]  88.65,52.83 90 top
U$107  [SDA1]  83.57,52.96 90 top
U$108  [SCL0]  81.03,53.21 90 top
U$109  [TX28]  77.34,36.7 0 top
U$110  [RX29]  77.34,34.16 0 top
U$111  [PWR26]  77.34,41.78 0 top
U$112  [D1327]  77.22,39.24 0 top
U$113  [QWIIC31]  123.83,20.95 90 top
U$114  [A020]  113.03,10.29 90 top
U$115  [A121]  115.57,10.29 90 top
U$116  [A222]  118.11,10.29 90 top
U$117  [A323]  120.65,10.29 90 top
U$118  [A424]  123.19,10.29 90 top
U$119  [A525]  125.73,10.29 90 top
U$120  [VIN19]  107.95,10.29 90 top
U$121  [GND16]  105.41,10.29 90 top
U$122  [GND16]  102.87,10.29 90 top
U$123  [#RESET1]  95.25,10.16 90 top
U$124  [REF0]  92.71,10.29 90 top
U$125  [AREF2]  86.11,52.2 90 top
U$126  [GND7]  130.05,30.1 90 top
U$127  [MOSI4]  130.05,32.77 90 top
U$128  [3V36]  130.05,36.07 90 top
U$129  [SCK5]  124.21,33.02 90 top
U$130  [MISO3]  124.21,35.56 90 top
U$131  [RESET0]  124.21,28.96 90 top
U$132  [3V325]  97.79,13.97 270 bottom
U$133  [A018]  113.03,13.34 270 bottom
U$134  [A119]  115.57,13.08 270 bottom
U$135  [A220]  118.11,13.34 270 bottom
U$136  [A321]  120.65,13.34 270 bottom
U$137  [A422]  123.19,13.21 270 bottom
U$138  [A523]  125.73,13.21 270 bottom
U$139  [AREF2]  86.11,56.77 270 bottom
U$140  [D0#RX17]  125.73,56.77 270 bottom
U$141  [D1#TX15]  123.19,56.77 270 bottom
U$142  [D79]  107.95,56.77 270 bottom
U$143  [D88]  103.89,56.64 270 bottom
U$144  [D97]  101.35,56.77 270 bottom
U$145  [D106]  98.81,56.77 270 bottom
U$146  [D115]  96.27,56.77 270 bottom
U$147  [D124]  93.73,56.77 270 bottom
U$148  [D133]  91.19,56.77 270 bottom
U$149  [D214]  120.65,56.77 270 bottom
U$150  [D313]  118.11,56.77 270 bottom
U$151  [D412]  115.57,56.77 270 bottom
U$152  [D511]  113.03,56.77 270 bottom
U$153  [D610]  110.49,56.77 270 bottom
U$154  [GND24]  88.65,56.77 270 bottom
U$155  [GND24]  102.87,14.22 270 bottom
U$156  [GND24]  105.41,14.22 270 bottom
U$157  [GND33]  130.05,33.78 270 bottom
U$158  [MISO30]  124.08,39.75 270 bottom
U$159  [MOSI34]  130.05,36.96 270 bottom
U$160  [REF28]  92.71,13.84 270 bottom
U$161  [RESET32]  124.08,33.91 270 bottom
U$162  [SCK31]  124.08,36.58 270 bottom
U$163  [SCL0]  81.03,56.77 270 bottom
U$164  [SDA1]  83.57,56.77 270 bottom
U$165  [VIN27]  107.95,13.72 270 bottom
U$166  [#RESET1]  95.25,14.86 270 bottom
U$167  [3V30]  130.05,39.75 270 bottom
U$168  [5V26]  100.33,13.21 270 bottom
U$169  [RESET0]  115.32,15.11 90 top
U$170  [BITMAP#JPG]  95.12,30.61 0 top
U$171  [440]  107.95,46.99 90 top
U$172  [REDBOARD_TURBO1]  106.43,52.32 270 bottom
U$173  [CHG_SET1]  96.9,28.45 270 bottom
U$174  [LED1]  80.64,44.07 270 bottom
U$175  [PWR0]  76.96,44.32 270 bottom
U$176  [VIN#_6V_MAX2]  77.34,8.38 0 top
U$177  [3V317]  160.02,10.29 90 top
U$178  [5V18]  162.56,10.29 90 top
U$179  [CHG30]  139.57,31.62 0 top
U$180  [RX#D015]  187.96,51.56 90 top
U$181  [TX#D114]  185.42,51.69 90 top
U$182  [D213]  182.88,53.85 90 top
U$183  [D312]  180.34,53.85 90 top
U$184  [D411]  177.8,53.85 90 top
U$185  [D510]  175.26,53.85 90 top
U$186  [D69]  172.72,53.85 90 top
U$187  [D78]  170.18,53.85 90 top
U$188  [D87]  166.12,53.85 90 top
U$189  [D96]  163.58,53.85 90 top
U$190  [D105]  161.04,53.34 90 top
U$191  [D114]  158.5,53.59 90 top
U$192  [D123]  155.96,53.34 90 top
U$193  [D132]  153.42,53.34 90 top
U$194  [GND16]  150.88,52.83 90 top
U$195  [SDA1]  145.8,52.96 90 top
U$196  [SCL0]  143.26,53.21 90 top
U$197  [TX28]  139.57,36.7 0 top
U$198  [RX29]  139.57,34.16 0 top
U$199  [PWR26]  139.57,41.78 0 top
U$200  [D1327]  139.45,39.24 0 top
U$201  [QWIIC31]  186.06,20.95 90 top
U$202  [A020]  175.26,10.29 90 top
U$203  [A121]  177.8,10.29 90 top
U$204  [A222]  180.34,10.29 90 top
U$205  [A323]  182.88,10.29 90 top
U$206  [A424]  185.42,10.29 90 top
U$207  [A525]  187.96,10.29 90 top
U$208  [VIN19]  170.18,10.29 90 top
U$209  [GND16]  167.64,10.29 90 top
U$210  [GND16]  165.1,10.29 90 top
U$211  [#RESET1]  157.48,10.16 90 top
U$212  [REF0]  154.94,10.29 90 top
U$213  [AREF2]  148.34,52.2 90 top
U$214  [GND7]  192.28,30.1 90 top
U$215  [MOSI4]  192.28,32.77 90 top
U$216  [3V36]  192.28,36.07 90 top
U$217  [SCK5]  186.44,33.02 90 top
U$218  [MISO3]  186.44,35.56 90 top
U$219  [RESET0]  186.44,28.96 90 top
U$220  [3V325]  160.02,13.97 270 bottom
U$221  [A018]  175.26,13.34 270 bottom
U$222  [A119]  177.8,13.08 270 bottom
U$223  [A220]  180.34,13.34 270 bottom
U$224  [A321]  182.88,13.34 270 bottom
U$225  [A422]  185.42,13.21 270 bottom
U$226  [A523]  187.96,13.21 270 bottom
U$227  [AREF2]  148.34,56.77 270 bottom
U$228  [D0#RX17]  187.96,56.77 270 bottom
U$229  [D1#TX15]  185.42,56.77 270 bottom
U$230  [D79]  170.18,56.77 270 bottom
U$231  [D88]  166.12,56.64 270 bottom
U$232  [D97]  163.58,56.77 270 bottom
U$233  [D106]  161.04,56.77 270 bottom
U$234  [D115]  158.5,56.77 270 bottom
U$235  [D124]  155.96,56.77 270 bottom
U$236  [D133]  153.42,56.77 270 bottom
U$237  [D214]  182.88,56.77 270 bottom
U$238  [D313]  180.34,56.77 270 bottom
U$239  [D412]  177.8,56.77 270 bottom
U$240  [D511]  175.26,56.77 270 bottom
U$241  [D610]  172.72,56.77 270 bottom
U$242  [GND24]  150.88,56.77 270 bottom
U$243  [GND24]  165.1,14.22 270 bottom
U$244  [GND24]  167.64,14.22 270 bottom
U$245  [GND33]  192.28,33.78 270 bottom
U$246  [MISO30]  186.31,39.75 270 bottom
U$247  [MOSI34]  192.28,36.96 270 bottom
U$248  [REF28]  154.94,13.84 270 bottom
U$249  [RESET32]  186.31,33.91 270 bottom
U$250  [SCK31]  186.31,36.58 270 bottom
U$251  [SCL0]  143.26,56.77 270 bottom
U$252  [SDA1]  145.8,56.77 270 bottom
U$253  [VIN27]  170.18,13.72 270 bottom
U$254  [#RESET1]  157.48,14.86 270 bottom
U$255  [3V30]  192.28,39.75 270 bottom
U$256  [5V26]  162.56,13.21 270 bottom
U$257  [RESET0]  177.55,15.11 90 top
U$258  [BITMAP#JPG]  157.35,30.61 0 top
U$259  [440]  170.18,46.99 90 top
U$260  [REDBOARD_TURBO1]  168.66,52.32 270 bottom
U$261  [CHG_SET1]  159.13,28.45 270 bottom
U$262  [LED1]  142.88,44.07 270 bottom
U$263  [PWR0]  139.19,44.32 270 bottom
U$264  [VIN#_6V_MAX2]  139.57,8.38 0 top
U$265  [3V317]  35.56,64.14 90 top
U$266  [5V18]  38.1,64.14 90 top
U$267  [CHG30]  15.11,85.47 0 top
U$268  [RX#D015]  63.5,105.41 90 top
U$269  [TX#D114]  60.96,105.54 90 top
U$270  [D213]  58.42,107.7 90 top
U$271  [D312]  55.88,107.7 90 top
U$272  [D411]  53.34,107.7 90 top
U$273  [D510]  50.8,107.7 90 top
U$274  [D69]  48.26,107.7 90 top
U$275  [D78]  45.72,107.7 90 top
U$276  [D87]  41.66,107.7 90 top
U$277  [D96]  39.12,107.7 90 top
U$278  [D105]  36.58,107.19 90 top
U$279  [D114]  34.04,107.44 90 top
U$280  [D123]  31.5,107.19 90 top
U$281  [D132]  28.96,107.19 90 top
U$282  [GND16]  26.42,106.68 90 top
U$283  [SDA1]  21.34,106.81 90 top
U$284  [SCL0]  18.8,107.06 90 top
U$285  [TX28]  15.11,90.55 0 top
U$286  [RX29]  15.11,88.01 0 top
U$287  [PWR26]  15.11,95.63 0 top
U$288  [D1327]  14.99,93.09 0 top
U$289  [QWIIC31]  61.59,74.8 90 top
U$290  [A020]  50.8,64.14 90 top
U$291  [A121]  53.34,64.14 90 top
U$292  [A222]  55.88,64.14 90 top
U$293  [A323]  58.42,64.14 90 top
U$294  [A424]  60.96,64.14 90 top
U$295  [A525]  63.5,64.14 90 top
U$296  [VIN19]  45.72,64.14 90 top
U$297  [GND16]  43.18,64.14 90 top
U$298  [GND16]  40.64,64.14 90 top
U$299  [#RESET1]  33.02,64.01 90 top
U$300  [REF0]  30.48,64.14 90 top
U$301  [AREF2]  23.88,106.05 90 top
U$302  [GND7]  67.82,83.95 90 top
U$303  [MOSI4]  67.82,86.61 90 top
U$304  [3V36]  67.82,89.92 90 top
U$305  [SCK5]  61.98,86.87 90 top
U$306  [MISO3]  61.98,89.41 90 top
U$307  [RESET0]  61.98,82.8 90 top
U$308  [3V325]  35.56,67.82 270 bottom
U$309  [A018]  50.8,67.18 270 bottom
U$310  [A119]  53.34,66.93 270 bottom
U$311  [A220]  55.88,67.18 270 bottom
U$312  [A321]  58.42,67.18 270 bottom
U$313  [A422]  60.96,67.06 270 bottom
U$314  [A523]  63.5,67.06 270 bottom
U$315  [AREF2]  23.88,110.62 270 bottom
U$316  [D0#RX17]  63.5,110.62 270 bottom
U$317  [D1#TX15]  60.96,110.62 270 bottom
U$318  [D79]  45.72,110.62 270 bottom
U$319  [D88]  41.66,110.49 270 bottom
U$320  [D97]  39.12,110.62 270 bottom
U$321  [D106]  36.58,110.62 270 bottom
U$322  [D115]  34.04,110.62 270 bottom
U$323  [D124]  31.5,110.62 270 bottom
U$324  [D133]  28.96,110.62 270 bottom
U$325  [D214]  58.42,110.62 270 bottom
U$326  [D313]  55.88,110.62 270 bottom
U$327  [D412]  53.34,110.62 270 bottom
U$328  [D511]  50.8,110.62 270 bottom
U$329  [D610]  48.26,110.62 270 bottom
U$330  [GND24]  26.42,110.62 270 bottom
U$331  [GND24]  40.64,68.07 270 bottom
U$332  [GND24]  43.18,68.07 270 bottom
U$333  [GND33]  67.82,87.63 270 bottom
U$334  [MISO30]  61.85,93.6 270 bottom
U$335  [MOSI34]  67.82,90.81 270 bottom
U$336  [REF28]  30.48,67.69 270 bottom
U$337  [RESET32]  61.85,87.76 270 bottom
U$338  [SCK31]  61.85,90.42 270 bottom
U$339  [SCL0]  18.8,110.62 270 bottom
U$340  [SDA1]  21.34,110.62 270 bottom
U$341  [VIN27]  45.72,67.56 270 bottom
U$342  [#RESET1]  33.02,68.71 270 bottom
U$343  [3V30]  67.82,93.6 270 bottom
U$344  [5V26]  38.1,67.06 270 bottom
U$345  [RESET0]  53.09,68.96 90 top
U$346  [BITMAP#JPG]  32.89,84.45 0 top
U$347  [440]  45.72,100.84 90 top
U$348  [REDBOARD_TURBO1]  44.2,106.17 270 bottom
U$349  [CHG_SET1]  34.67,82.3 270 bottom
U$350  [LED1]  18.41,97.92 270 bottom
U$351  [PWR0]  14.73,98.17 270 bottom
U$352  [VIN#_6V_MAX2]  15.11,62.23 0 top
U$353  [3V317]  97.79,64.14 90 top
U$354  [5V18]  100.33,64.14 90 top
U$355  [CHG30]  77.34,85.47 0 top
U$356  [RX#D015]  125.73,105.41 90 top
U$357  [TX#D114]  123.19,105.54 90 top
U$358  [D213]  120.65,107.7 90 top
U$359  [D312]  118.11,107.7 90 top
U$360  [D411]  115.57,107.7 90 top
U$361  [D510]  113.03,107.7 90 top
U$362  [D69]  110.49,107.7 90 top
U$363  [D78]  107.95,107.7 90 top
U$364  [D87]  103.89,107.7 90 top
U$365  [D96]  101.35,107.7 90 top
U$366  [D105]  98.81,107.19 90 top
U$367  [D114]  96.27,107.44 90 top
U$368  [D123]  93.73,107.19 90 top
U$369  [D132]  91.19,107.19 90 top
U$370  [GND16]  88.65,106.68 90 top
U$371  [SDA1]  83.57,106.81 90 top
U$372  [SCL0]  81.03,107.06 90 top
U$373  [TX28]  77.34,90.55 0 top
U$374  [RX29]  77.34,88.01 0 top
U$375  [PWR26]  77.34,95.63 0 top
U$376  [D1327]  77.22,93.09 0 top
U$377  [QWIIC31]  123.83,74.8 90 top
U$378  [A020]  113.03,64.14 90 top
U$379  [A121]  115.57,64.14 90 top
U$380  [A222]  118.11,64.14 90 top
U$381  [A323]  120.65,64.14 90 top
U$382  [A424]  123.19,64.14 90 top
U$383  [A525]  125.73,64.14 90 top
U$384  [VIN19]  107.95,64.14 90 top
U$385  [GND16]  105.41,64.14 90 top
U$386  [GND16]  102.87,64.14 90 top
U$387  [#RESET1]  95.25,64.01 90 top
U$388  [REF0]  92.71,64.14 90 top
U$389  [AREF2]  86.11,106.05 90 top
U$390  [GND7]  130.05,83.95 90 top
U$391  [MOSI4]  130.05,86.61 90 top
U$392  [3V36]  130.05,89.92 90 top
U$393  [SCK5]  124.21,86.87 90 top
U$394  [MISO3]  124.21,89.41 90 top
U$395  [RESET0]  124.21,82.8 90 top
U$396  [3V325]  97.79,67.82 270 bottom
U$397  [A018]  113.03,67.18 270 bottom
U$398  [A119]  115.57,66.93 270 bottom
U$399  [A220]  118.11,67.18 270 bottom
U$400  [A321]  120.65,67.18 270 bottom
U$401  [A422]  123.19,67.06 270 bottom
U$402  [A523]  125.73,67.06 270 bottom
U$403  [AREF2]  86.11,110.62 270 bottom
U$404  [D0#RX17]  125.73,110.62 270 bottom
U$405  [D1#TX15]  123.19,110.62 270 bottom
U$406  [D79]  107.95,110.62 270 bottom
U$407  [D88]  103.89,110.49 270 bottom
U$408  [D97]  101.35,110.62 270 bottom
U$409  [D106]  98.81,110.62 270 bottom
U$410  [D115]  96.27,110.62 270 bottom
U$411  [D124]  93.73,110.62 270 bottom
U$412  [D133]  91.19,110.62 270 bottom
U$413  [D214]  120.65,110.62 270 bottom
U$414  [D313]  118.11,110.62 270 bottom
U$415  [D412]  115.57,110.62 270 bottom
U$416  [D511]  113.03,110.62 270 bottom
U$417  [D610]  110.49,110.62 270 bottom
U$418  [GND24]  88.65,110.62 270 bottom
U$419  [GND24]  102.87,68.07 270 bottom
U$420  [GND24]  105.41,68.07 270 bottom
U$421  [GND33]  130.05,87.63 270 bottom
U$422  [MISO30]  124.08,93.6 270 bottom
U$423  [MOSI34]  130.05,90.81 270 bottom
U$424  [REF28]  92.71,67.69 270 bottom
U$425  [RESET32]  124.08,87.76 270 bottom
U$426  [SCK31]  124.08,90.42 270 bottom
U$427  [SCL0]  81.03,110.62 270 bottom
U$428  [SDA1]  83.57,110.62 270 bottom
U$429  [VIN27]  107.95,67.56 270 bottom
U$430  [#RESET1]  95.25,68.71 270 bottom
U$431  [3V30]  130.05,93.6 270 bottom
U$432  [5V26]  100.33,67.06 270 bottom
U$433  [RESET0]  115.32,68.96 90 top
U$434  [BITMAP#JPG]  95.12,84.45 0 top
U$435  [440]  107.95,100.84 90 top
U$436  [REDBOARD_TURBO1]  106.43,106.17 270 bottom
U$437  [CHG_SET1]  96.9,82.3 270 bottom
U$438  [LED1]  80.64,97.92 270 bottom
U$439  [PWR0]  76.96,98.17 270 bottom
U$440  [VIN#_6V_MAX2]  77.34,62.23 0 top
U$441  [3V317]  160.02,64.14 90 top
U$442  [5V18]  162.56,64.14 90 top
U$443  [CHG30]  139.57,85.47 0 top
U$444  [RX#D015]  187.96,105.41 90 top
U$445  [TX#D114]  185.42,105.54 90 top
U$446  [D213]  182.88,107.7 90 top
U$447  [D312]  180.34,107.7 90 top
U$448  [D411]  177.8,107.7 90 top
U$449  [D510]  175.26,107.7 90 top
U$450  [D69]  172.72,107.7 90 top
U$451  [D78]  170.18,107.7 90 top
U$452  [D87]  166.12,107.7 90 top
U$453  [D96]  163.58,107.7 90 top
U$454  [D105]  161.04,107.19 90 top
U$455  [D114]  158.5,107.44 90 top
U$456  [D123]  155.96,107.19 90 top
U$457  [D132]  153.42,107.19 90 top
U$458  [GND16]  150.88,106.68 90 top
U$459  [SDA1]  145.8,106.81 90 top
U$460  [SCL0]  143.26,107.06 90 top
U$461  [TX28]  139.57,90.55 0 top
U$462  [RX29]  139.57,88.01 0 top
U$463  [PWR26]  139.57,95.63 0 top
U$464  [D1327]  139.45,93.09 0 top
U$465  [QWIIC31]  186.06,74.8 90 top
U$466  [A020]  175.26,64.14 90 top
U$467  [A121]  177.8,64.14 90 top
U$468  [A222]  180.34,64.14 90 top
U$469  [A323]  182.88,64.14 90 top
U$470  [A424]  185.42,64.14 90 top
U$471  [A525]  187.96,64.14 90 top
U$472  [VIN19]  170.18,64.14 90 top
U$473  [GND16]  167.64,64.14 90 top
U$474  [GND16]  165.1,64.14 90 top
U$475  [#RESET1]  157.48,64.01 90 top
U$476  [REF0]  154.94,64.14 90 top
U$477  [AREF2]  148.34,106.05 90 top
U$478  [GND7]  192.28,83.95 90 top
U$479  [MOSI4]  192.28,86.61 90 top
U$480  [3V36]  192.28,89.92 90 top
U$481  [SCK5]  186.44,86.87 90 top
U$482  [MISO3]  186.44,89.41 90 top
U$483  [RESET0]  186.44,82.8 90 top
U$484  [3V325]  160.02,67.82 270 bottom
U$485  [A018]  175.26,67.18 270 bottom
U$486  [A119]  177.8,66.93 270 bottom
U$487  [A220]  180.34,67.18 270 bottom
U$488  [A321]  182.88,67.18 270 bottom
U$489  [A422]  185.42,67.06 270 bottom
U$490  [A523]  187.96,67.06 270 bottom
U$491  [AREF2]  148.34,110.62 270 bottom
U$492  [D0#RX17]  187.96,110.62 270 bottom
U$493  [D1#TX15]  185.42,110.62 270 bottom
U$494  [D79]  170.18,110.62 270 bottom
U$495  [D88]  166.12,110.49 270 bottom
U$496  [D97]  163.58,110.62 270 bottom
U$497  [D106]  161.04,110.62 270 bottom
U$498  [D115]  158.5,110.62 270 bottom
U$499  [D124]  155.96,110.62 270 bottom
U$500  [D133]  153.42,110.62 270 bottom
U$501  [D214]  182.88,110.62 270 bottom
U$502  [D313]  180.34,110.62 270 bottom
U$503  [D412]  177.8,110.62 270 bottom
U$504  [D511]  175.26,110.62 270 bottom
U$505  [D610]  172.72,110.62 270 bottom
U$506  [GND24]  150.88,110.62 270 bottom
U$507  [GND24]  165.1,68.07 270 bottom
U$508  [GND24]  167.64,68.07 270 bottom
U$509  [GND33]  192.28,87.63 270 bottom
U$510  [MISO30]  186.31,93.6 270 bottom
U$511  [MOSI34]  192.28,90.81 270 bottom
U$512  [REF28]  154.94,67.69 270 bottom
U$513  [RESET32]  186.31,87.76 270 bottom
U$514  [SCK31]  186.31,90.42 270 bottom
U$515  [SCL0]  143.26,110.62 270 bottom
U$516  [SDA1]  145.8,110.62 270 bottom
U$517  [VIN27]  170.18,67.56 270 bottom
U$518  [#RESET1]  157.48,68.71 270 bottom
U$519  [3V30]  192.28,93.6 270 bottom
U$520  [5V26]  162.56,67.06 270 bottom
U$521  [RESET0]  177.55,68.96 90 top
U$522  [BITMAP#JPG]  157.35,84.45 0 top
U$523  [440]  170.18,100.84 90 top
U$524  [REDBOARD_TURBO1]  168.66,106.17 270 bottom
U$525  [CHG_SET1]  159.13,82.3 270 bottom
U$526  [LED1]  142.88,97.92 270 bottom
U$527  [PWR0]  139.19,98.17 270 bottom
U$528  [VIN#_6V_MAX2]  139.57,62.23 0 top
U$529  [3V317]  35.56,117.98 90 top
U$530  [5V18]  38.1,117.98 90 top
U$531  [CHG30]  15.11,139.32 0 top
U$532  [RX#D015]  63.5,159.26 90 top
U$533  [TX#D114]  60.96,159.38 90 top
U$534  [D213]  58.42,161.54 90 top
U$535  [D312]  55.88,161.54 90 top
U$536  [D411]  53.34,161.54 90 top
U$537  [D510]  50.8,161.54 90 top
U$538  [D69]  48.26,161.54 90 top
U$539  [D78]  45.72,161.54 90 top
U$540  [D87]  41.66,161.54 90 top